# Altium PCB PDM.PcbDoc (part 1 of 4)
Units mm, origin at the board's own origin, x right, y up, seen from the top; angles counter-clockwise.
Board outline 144.75 x 149.75 mm, 4 copper layers (Top Layer, GND, 3V3, Bottom Layer), stack 1.792 mm thick; 174 components, 85 nets, 467 pads, 47 vias.
Unrouted connection lines stored in the file: 147.
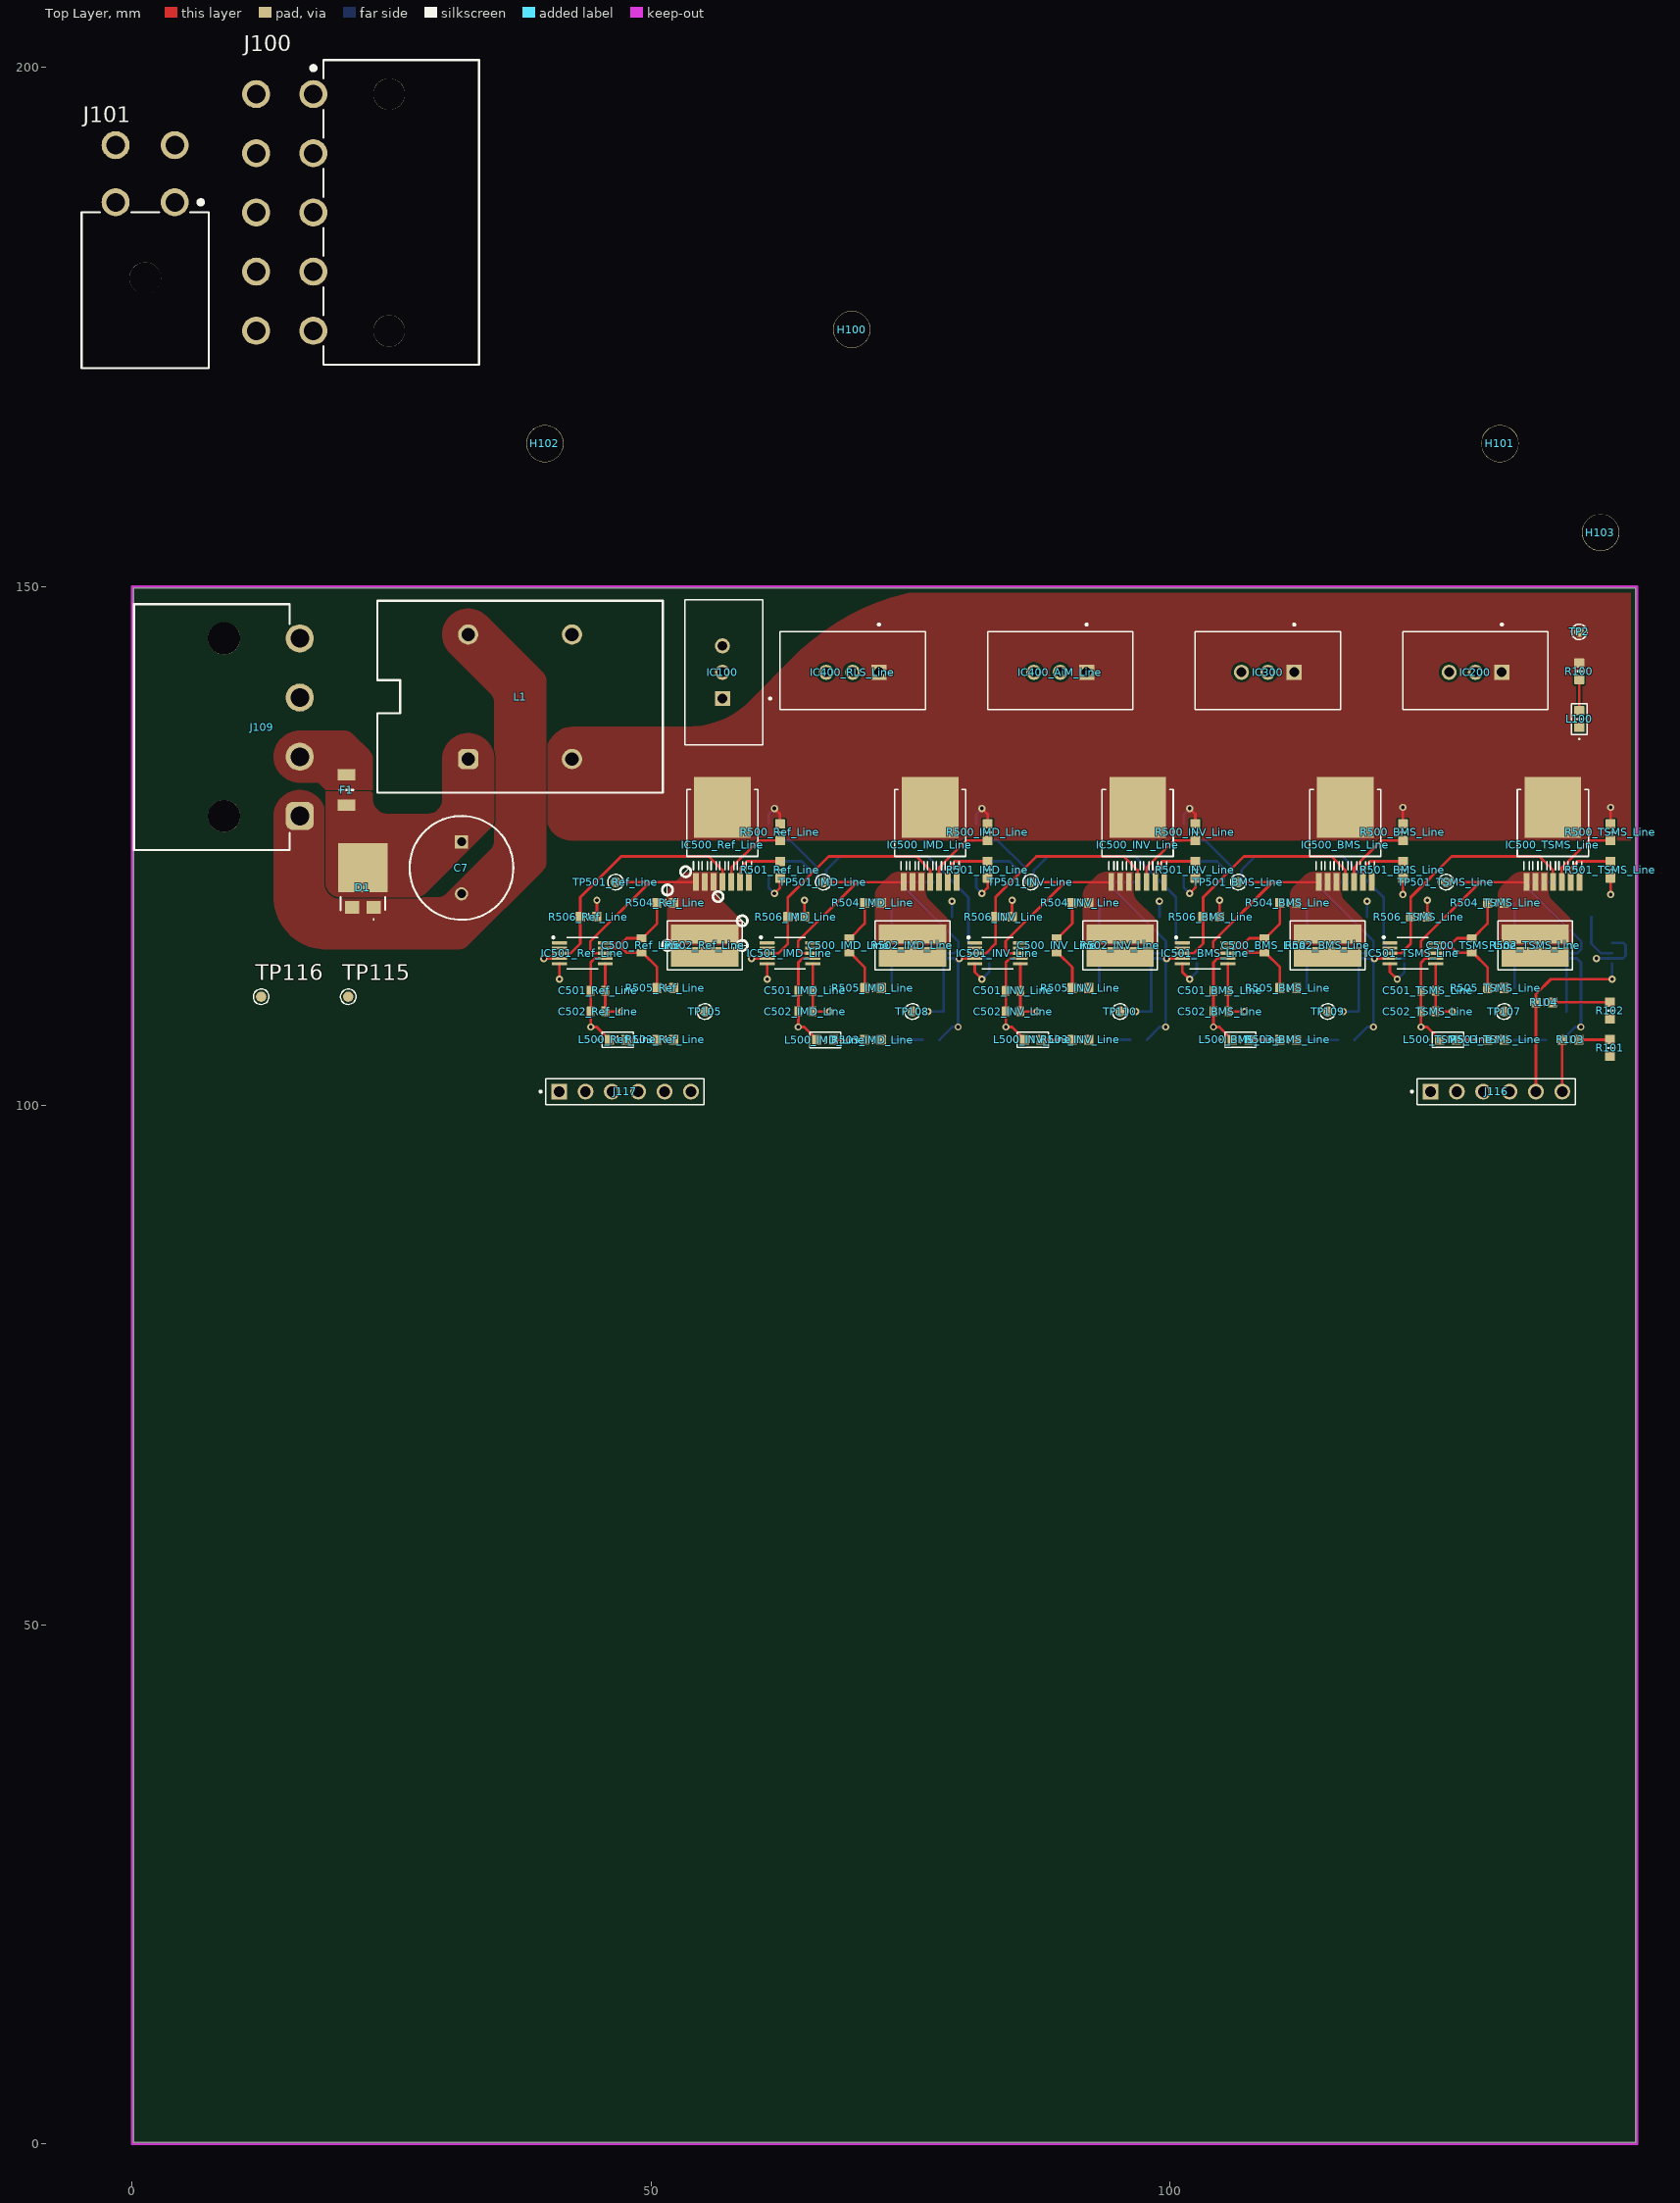
[diagram p0: Top Layer view]
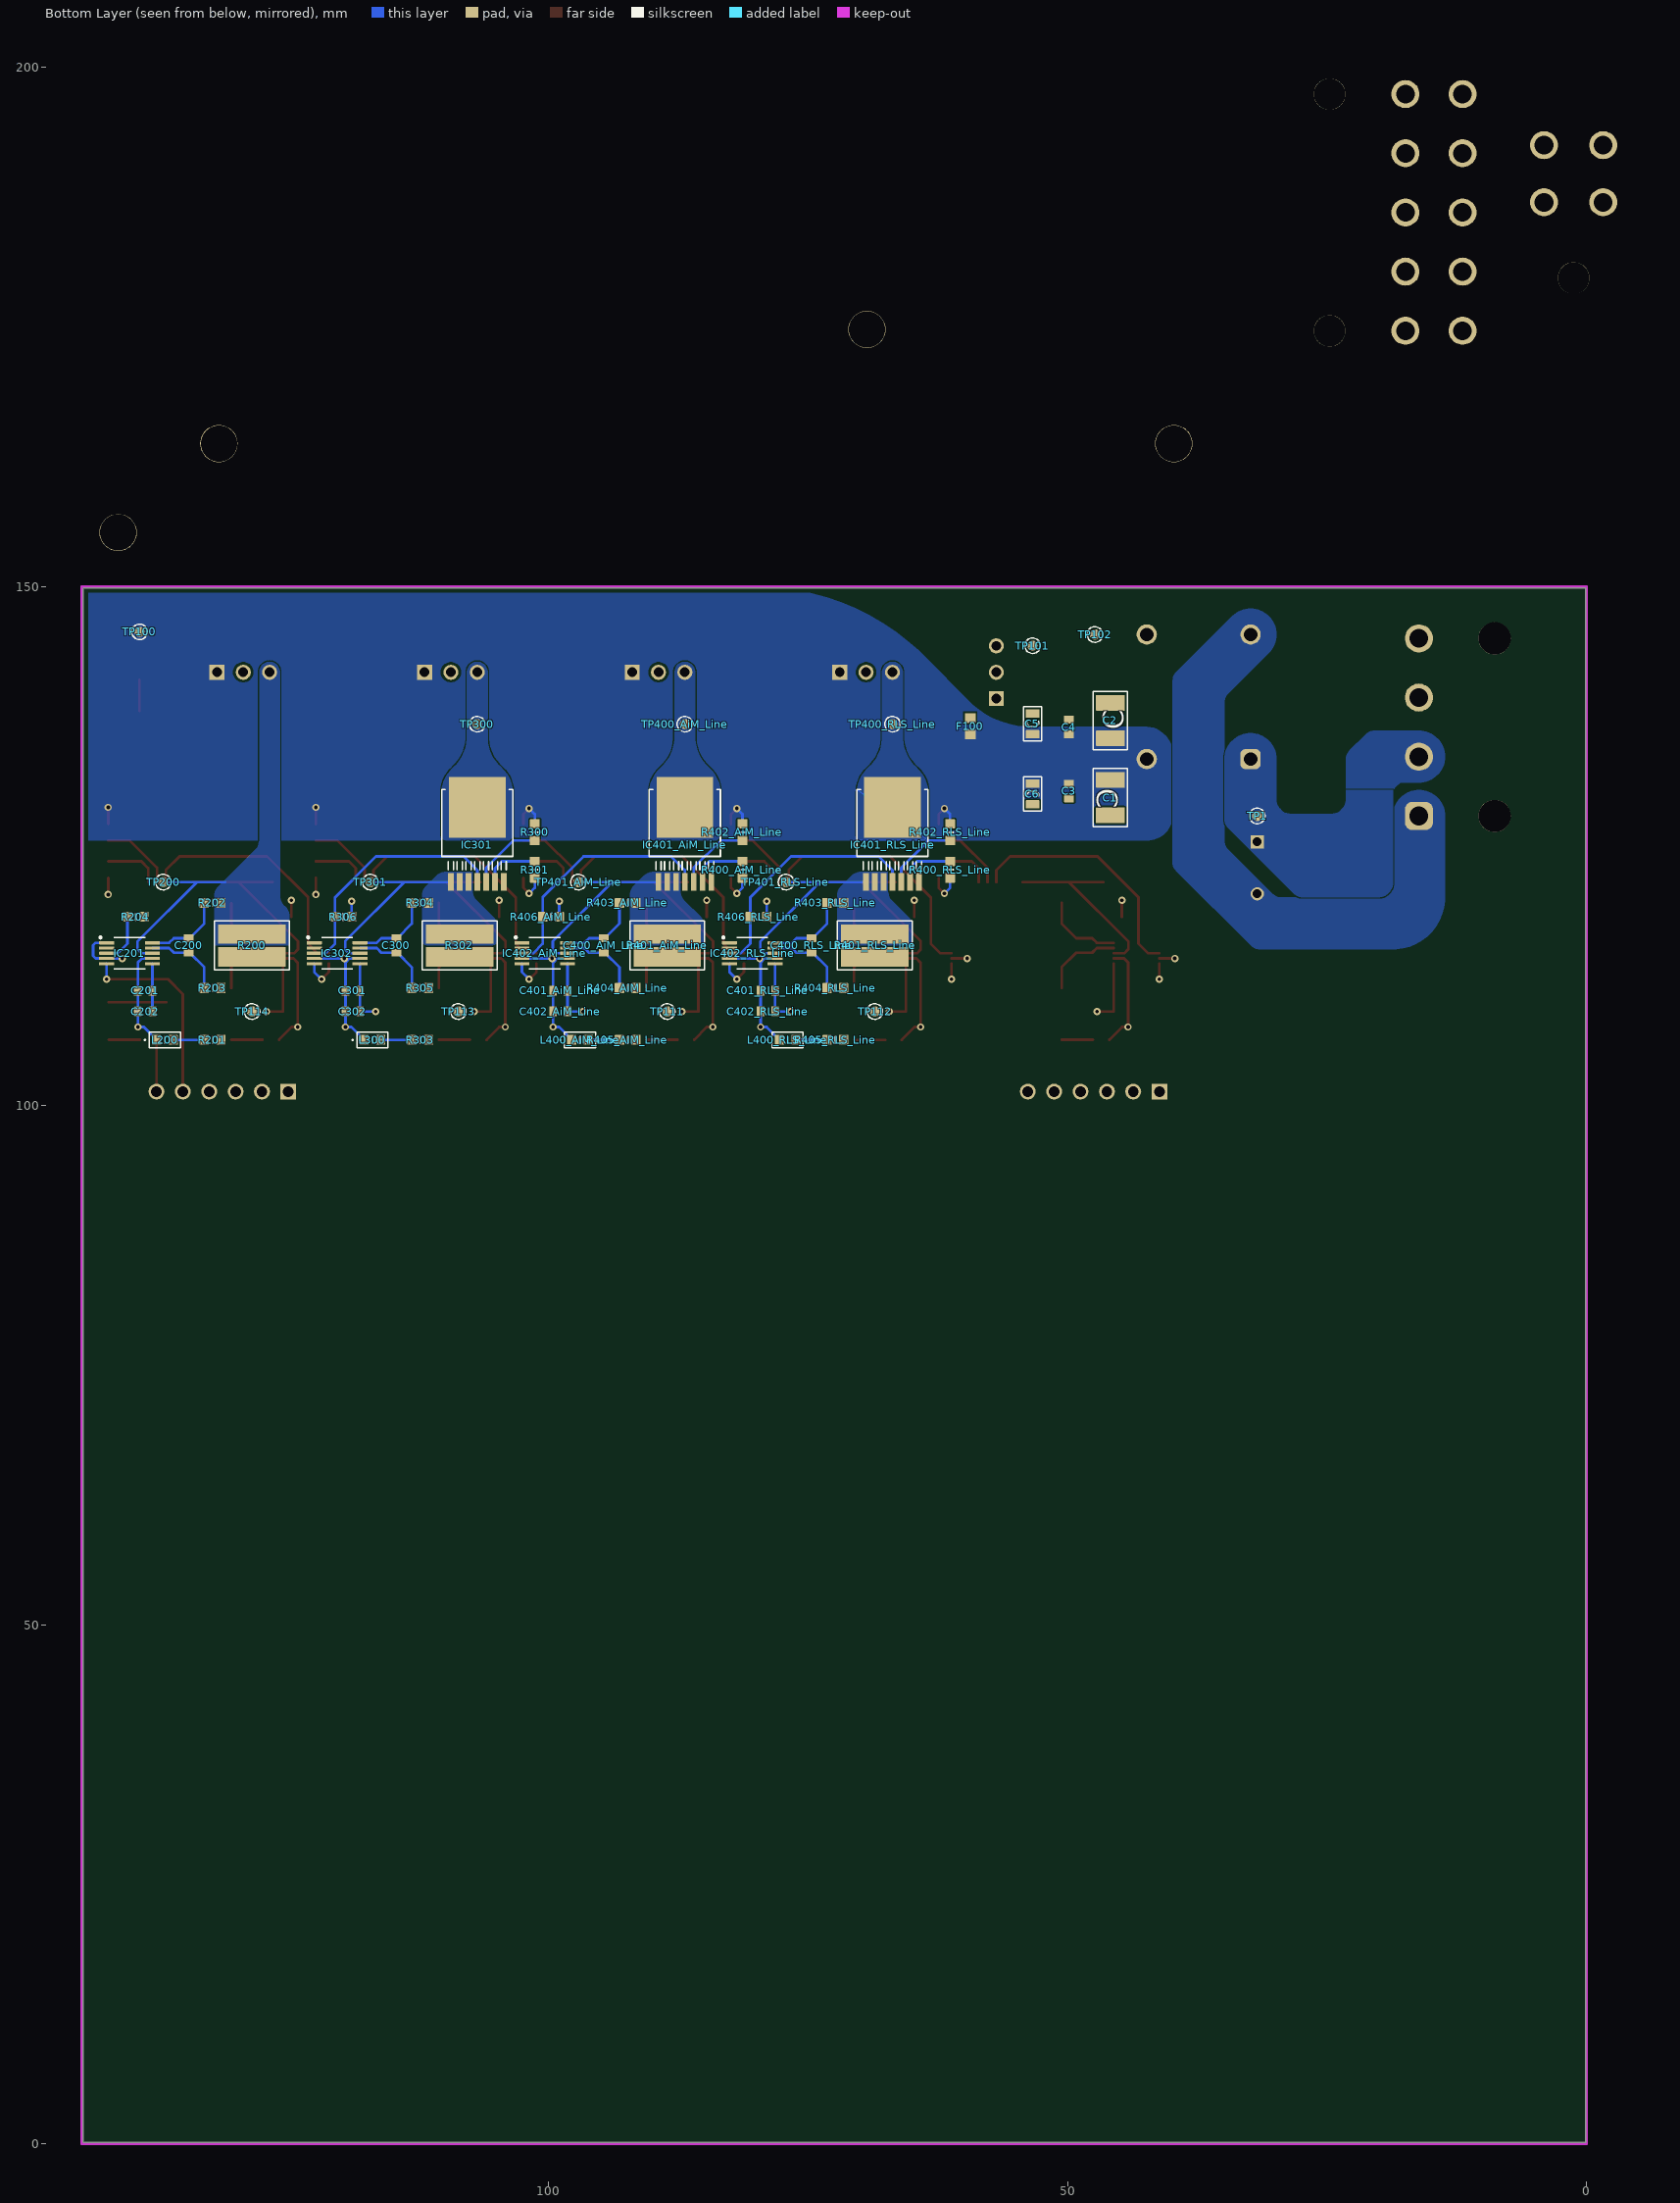
[diagram p1: Bottom Layer view, seen from below]
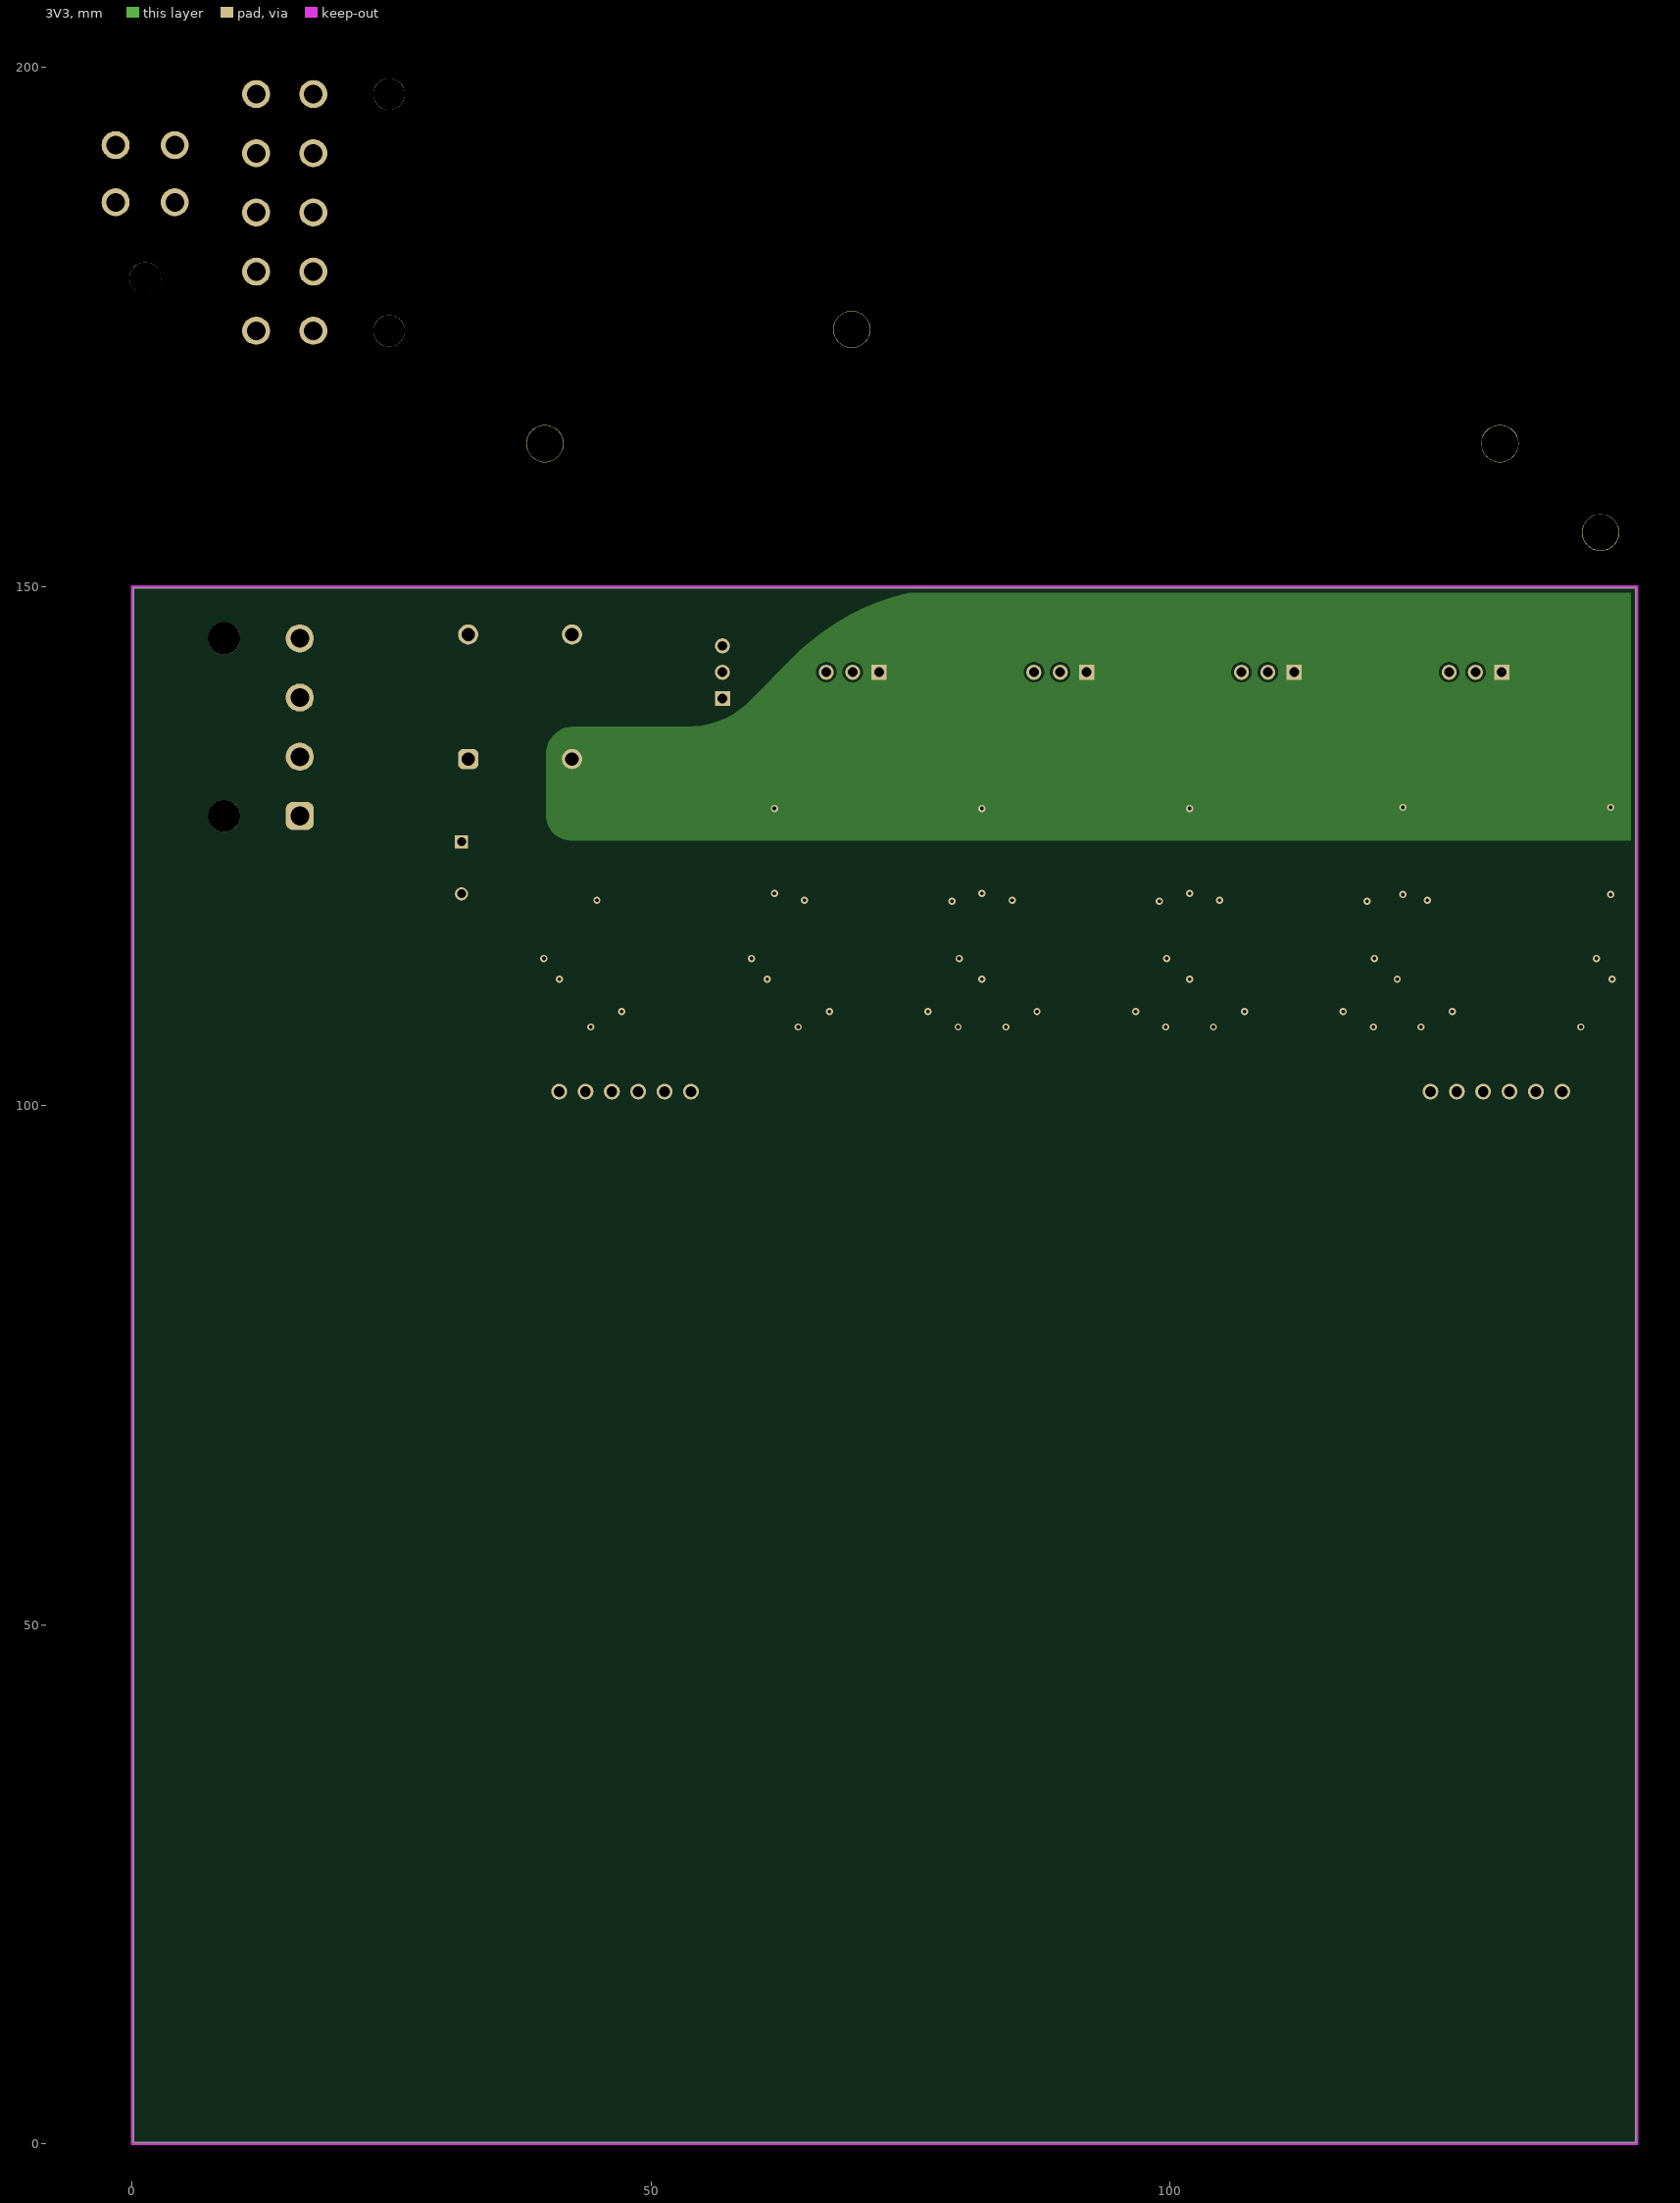
[diagram p2: 3V3]
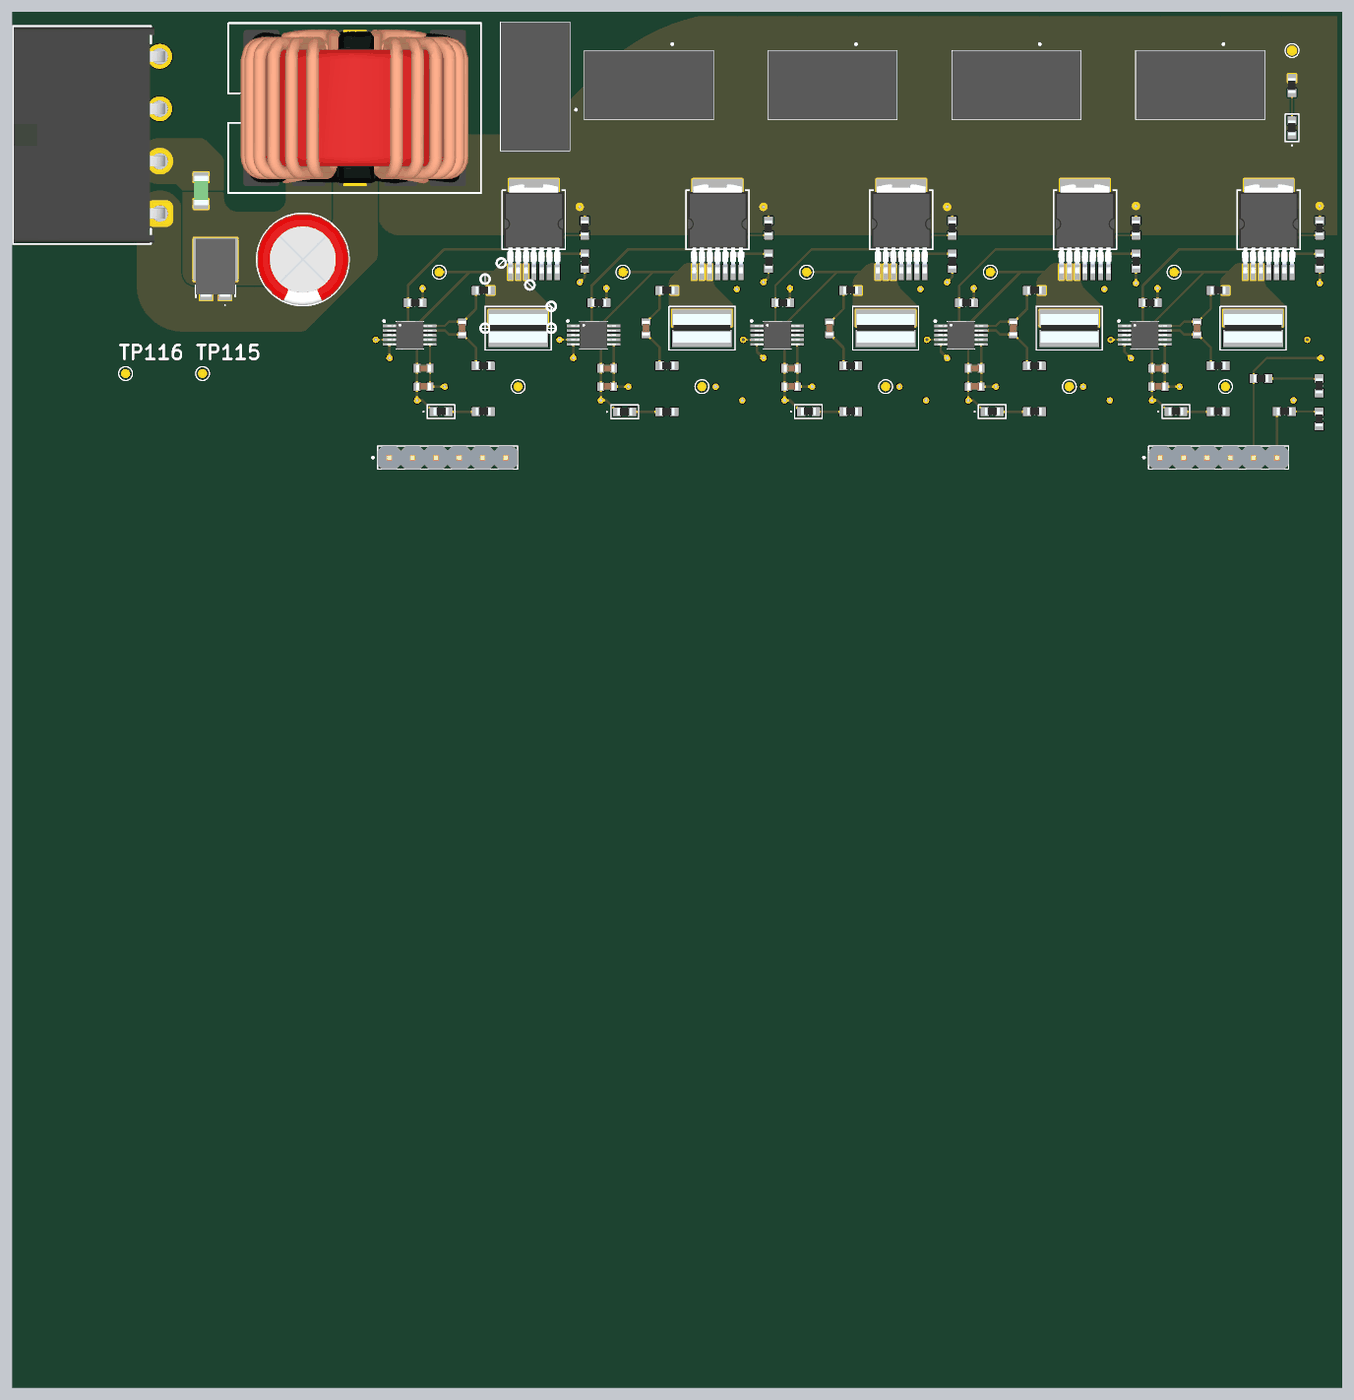
[diagram p5: 3D render of the assembled board from above, using the file's embedded part models]
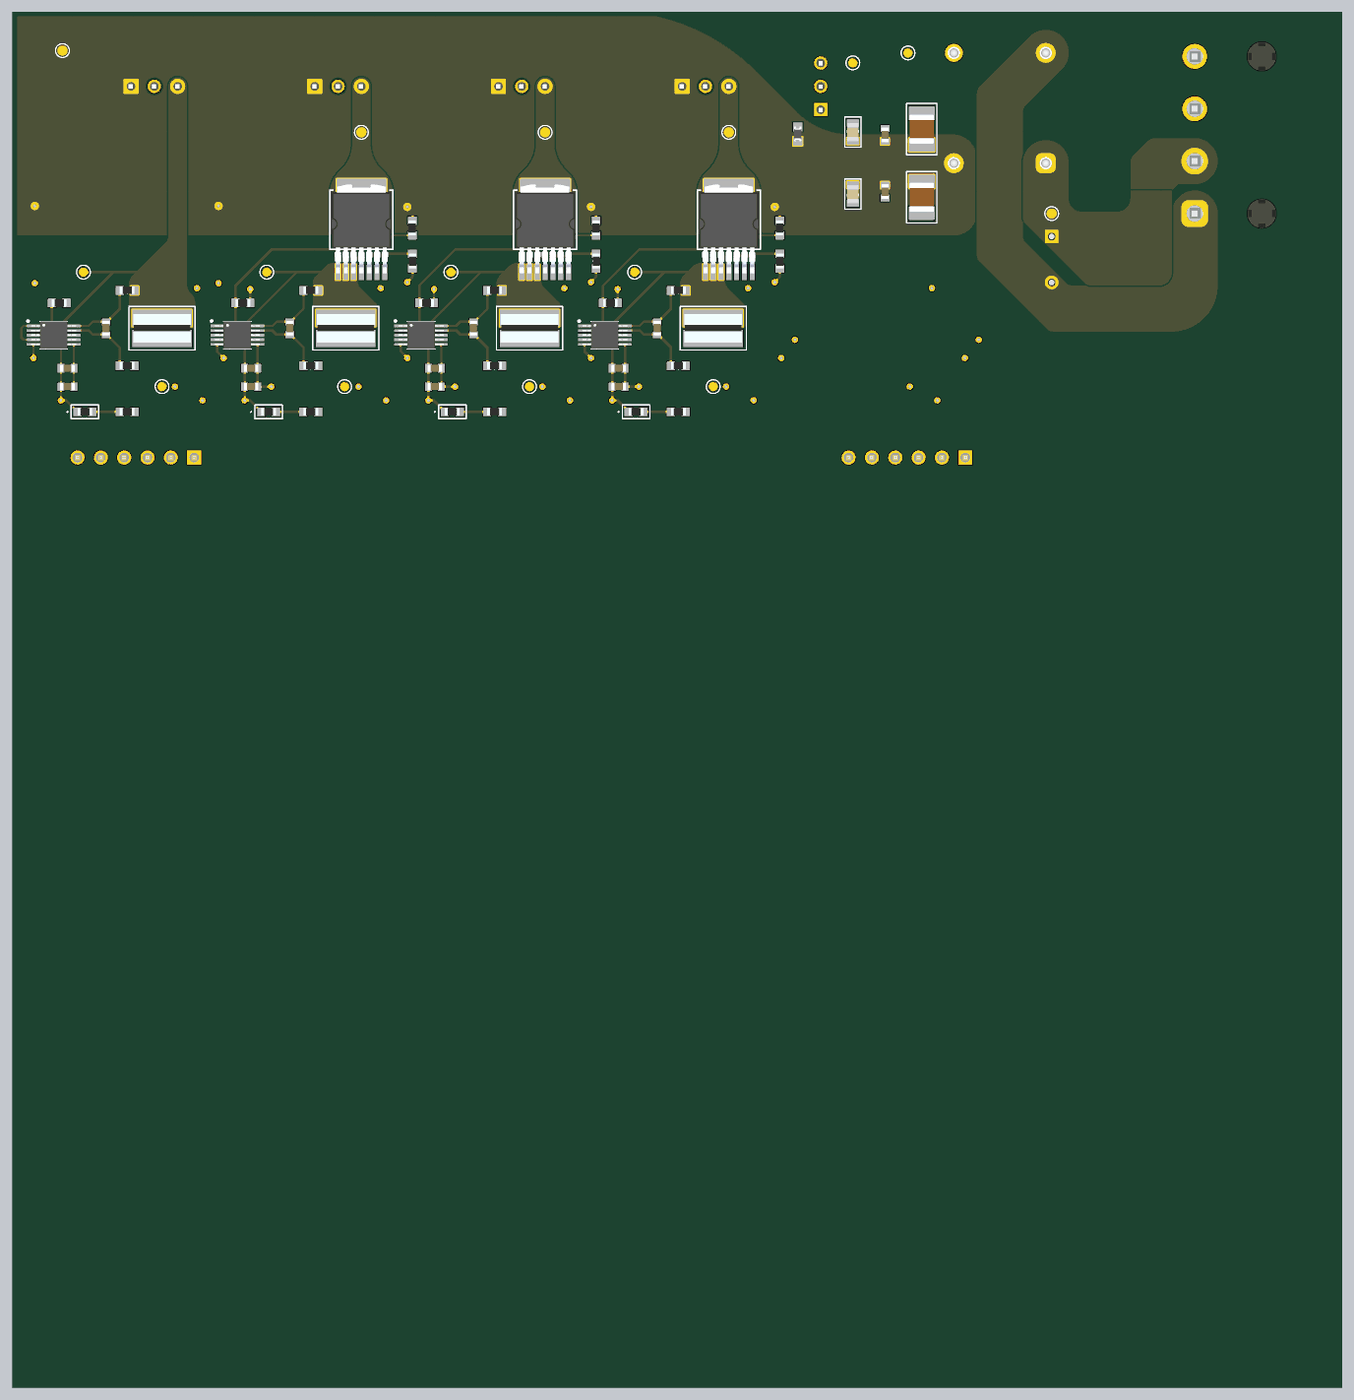
[diagram p6: 3D render of the assembled board from below, using the file's embedded part models]

## Layer stack, top to bottom
Top Solder: solder mask 0.0102, Solder Resist, Dk 3.5
Top Layer: signal copper 0.035
Dielectric 2: prepreg 0.0711, PP-006, Dk 4.1
GND: signal copper 0.035
Dielectric 1: core 1.51, Core-009, Dk 4.5
3V3: signal copper 0.035
Dielectric 3: prepreg 0.0711, PP-006, Dk 4.1
Bottom Layer: signal copper 0.035
Bottom Solder: solder mask 0.0102, Solder Resist, Dk 3.5

## Board outline
0.127,0.127 0.127,149.873 144.873,149.873 144.873,0.127

## Design rules (kind name [scope] priority, off if disabled: settings)
AssemblyTestPointUsage [All] p1 off:
AssemblyTestpoint [All] p1 off: testpointundercomponent=TRUE minsize=1.016 maxsize=2.54 preferedsize=1.524 minholesize=0 maxholesize=1.016 preferedholesize=0.813 testpointgrid=0.025 usegrid=TRUE gridtolerance=0 allowsidetop=TRUE allowsidebottom=TRUE
BoardOutlineClearance [All] p1: gap=0.5 ignorepadtopadclearanceinfootprint=FALSE
Clearance [All] p1: gap=0.15 ignorepadtopadclearanceinfootprint=FALSE except(0.5: Fill-Hole Poly-Hole Region-Hole)
ComponentClearance [All] p1: gap=0.254 collisioncheckmode=3 verticalgap=0.254 showdistances=FALSE donotcheckwithout3dbody=TRUE
DiffPairsRouting CHRG_USB [InDifferentialPair('CHRG_USB')] p1: maxlimit=0.15 minlimit=0.15 mostfreqgap=0.15 toplayer_minwidth=0.129 toplayer_maxwidth=0.129 toplayer_prefwidth=0.129 bottomlayer_minwidth=0.129 bottomlayer_maxwidth=0.129 bottomlayer_prefwidth=0.129 impedanceprofiledriven=TRUE impedanceprofileid={92A8E9D1-0FB6-4D3A-BABC-FC16B8604E78} impedanceprofilevalue=90.000000 maxuncoupledlength=10
DiffPairsRouting USB [InDifferentialPair('USB')] p2: maxlimit=0.15 minlimit=0.15 mostfreqgap=0.15 toplayer_minwidth=0.129 toplayer_maxwidth=0.129 toplayer_prefwidth=0.129 bottomlayer_minwidth=0.129 bottomlayer_maxwidth=0.129 bottomlayer_prefwidth=0.129 impedanceprofiledriven=TRUE impedanceprofileid={92A8E9D1-0FB6-4D3A-BABC-FC16B8604E78} impedanceprofilevalue=90.000000 maxuncoupledlength=10
DiffPairsRouting USB_conn [InDifferentialPair('USB_conn')] p3: maxlimit=0.15 minlimit=0.15 mostfreqgap=0.15 toplayer_minwidth=0.129 toplayer_maxwidth=0.129 toplayer_prefwidth=0.129 bottomlayer_minwidth=0.129 bottomlayer_maxwidth=0.129 bottomlayer_prefwidth=0.129 impedanceprofiledriven=TRUE impedanceprofileid={92A8E9D1-0FB6-4D3A-BABC-FC16B8604E78} impedanceprofilevalue=90.000000 maxuncoupledlength=10
DiffPairsRouting [All] p4: maxlimit=0.254 minlimit=0.254 mostfreqgap=0.254 toplayer_minwidth=0.381 toplayer_maxwidth=0.381 toplayer_prefwidth=0.381 midlayer1_minwidth=0.381 midlayer1_maxwidth=0.381 midlayer1_prefwidth=0.381 midlayer2_minwidth=0.381 midlayer2_maxwidth=0.381 midlayer2_prefwidth=0.381 bottomlayer_minwidth=0.381 bottomlayer_maxwidth=0.381 bottomlayer_prefwidth=0.381 maxuncoupledlength=12.7
FabricationTestPointUsage [All] p1 off: valid=0 allowmultiple=FALSE
FabricationTestpoint [All] p1 off: side=3 testpointundercomponent=TRUE minsize=1.016 maxsize=2.54 preferedsize=1.524 minholesize=0 maxholesize=1.016 preferedholesize=0.813 testpointgrid=0.025 allowsidetop=TRUE allowsidebottom=TRUE usegrid=TRUE gridtolerance=0
HoleSize [All] p1: absolutevalues=TRUE maxlimit=5.6 minlimit=0.5 maxpercent=80.000 minpercent=20.000
HoleToHoleClearance [All] p1: gap=0.3 allowstackedmicrovias=TRUE
MinimumAnnularRing [All] p1: minimumring=0.3
MinimumSolderMaskSliver [All] p1: minsoldermaskwidth=0.1
PlaneClearance [All] p1: clearance=0.254
PlaneConnect [All] p1: pad.planeconnectstyle=Relief pad.reliefexpansion=0.508 pad.reliefentries=4 pad.reliefconductorwidth=0.254 pad.reliefairgap=0.254 via.planeconnectstyle=Direct via.reliefexpansion=0.508 via.reliefentries=4 via.reliefconductorwidth=0.254 via.reliefairgap=0.254
PolygonConnect "BAT PWR THT direct" [InComponent('J916') vs InNet('BATT')] p1: connectstyle=Direct reliefconductorwidth=0.254 reliefentries=4 polygonreliefangle="90 Angle" airgapwidth=0.254
PolygonConnect "BAT GND THT direct" [InComponent('J917') vs InNet('GND')] p2: connectstyle=Direct reliefconductorwidth=0.254 reliefentries=4 polygonreliefangle="90 Angle" airgapwidth=0.254
PolygonConnect "USB GND Direct" [InComponent('USB600') vs InNet('GND')] p3: connectstyle=Direct reliefconductorwidth=0.254 reliefentries=4 polygonreliefangle="90 Angle" airgapwidth=0.254
PolygonConnect "XTAL relief" [InComponent('C400') or InComponent('C402') or  InComponent('C403') or  InComponent('C404') or InComponent('XTAL401') vs InNet('GND')] p4: connectstyle=Relief reliefconductorwidth=0.15 reliefentries=4 polygonreliefangle="90 Angle" airgapwidth=0.15
PolygonConnect [All] p5: connectstyle=Direct reliefconductorwidth=0.254 reliefentries=4 polygonreliefangle="90 Angle" airgapwidth=0.254
RoutingVias [All] p1: holewidth=0.35 width=0.7 viastyle="Through Hole" minholewidth=0.15 minwidth=0.25 maxholewidth=0.711 maxwidth=1.27
SilkToSilkClearance [All] p1 off: silktosilkclearance=0.254
SilkToSolderMaskClearance [IsPad] p1: minsilkscreentomaskgap=0.15 clearancetoexposedcopper=TRUE
SolderMaskExpansion [All] p1: expansion=0.102 istentingtop=FALSE
SupplyNets "Schematic Supply Nets_1" [InNet('3V3')] p1: voltage=0.000
SupplyNets "Schematic Supply Nets" [InNet('GND')] p2: voltage=0.000
SupplyNets "Schematic Supply Nets_7" [InNet('24V')] p3: voltage=0.000
UnRoutedNet [All] p1: checkbadconnections=TRUE
Width USART2 [InNetClass('USART2')] p1: maxlimit=0.156 minlimit=0.156 preferedwidth=0.156 impedanceprofiledriven=TRUE impedanceprofileid={209BCAA6-5E9C-45D0-BAB2-01DA54B45BDC} impedanceprofilevalue=50.000000 minimp=50.000000 maximp=50.000000 favimp=50.000000
Width I2C [InNetClass('I2C1') or InNetClass('I2C2')] p2: maxlimit=0.156 minlimit=0.156 preferedwidth=0.156 impedanceprofiledriven=TRUE impedanceprofileid={209BCAA6-5E9C-45D0-BAB2-01DA54B45BDC} impedanceprofilevalue=50.000000 minimp=50.000000 maximp=50.000000 favimp=50.000000
Width [All] p3: maxlimit=3 minlimit=0.15 preferedwidth=0.254
16 further rules are at their usual default settings.

## Classes and differential pairs
component class TSMS_Line: C500_TSMS_Line C501_TSMS_Line C502_TSMS_Line IC500_TSMS_Line IC501_TSMS_Line L500_TSMS_Line R500_TSMS_Line R501_TSMS_Line R502_TSMS_Line R503_TSMS_Line R504_TSMS_Line R505_TSMS_Line R506_TSMS_Line TP501_TSMS_Line
component class Entrada: C1 C2 C3 C4 C5 C6 C7 D1 F1 L1 TP1 TP2
component class INV_Line: C500_INV_Line C501_INV_Line C502_INV_Line IC500_INV_Line IC501_INV_Line L500_INV_Line R500_INV_Line R501_INV_Line R502_INV_Line R503_INV_Line R504_INV_Line R505_INV_Line R506_INV_Line TP501_INV_Line
channel class Power_Line_24V: BMS_Line IMD_Line INV_Line Ref_Line TSMS_Line
channel class Power_Line_12V: AiM_Line RLS_Line
component class RLS_Line: C400_RLS_Line C401_RLS_Line C402_RLS_Line IC8_RLS_Line IC400_RLS_Line IC401_RLS_Line IC402_RLS_Line L400_RLS_Line R14_RLS_Line R400_RLS_Line R401_RLS_Line R402_RLS_Line R403_RLS_Line R404_RLS_Line R405_RLS_Line R406_RLS_Line TP400_RLS_Line TP401_RLS_Line
component class Ref_Line: C500_Ref_Line C501_Ref_Line C502_Ref_Line IC11_Ref_Line IC500_Ref_Line IC501_Ref_Line L500_Ref_Line R20_Ref_Line R500_Ref_Line R501_Ref_Line R502_Ref_Line R503_Ref_Line R504_Ref_Line R505_Ref_Line R506_Ref_Line TP501_Ref_Line
component class IMD_Line: C500_IMD_Line C501_IMD_Line C502_IMD_Line IC11_IMD_Line IC500_IMD_Line IC501_IMD_Line L500_IMD_Line R20_IMD_Line R500_IMD_Line R501_IMD_Line R502_IMD_Line R503_IMD_Line R504_IMD_Line R505_IMD_Line R506_IMD_Line TP501_IMD_Line
component class ECU_Line: C200 C201 C202 IC2 IC200 IC201 L200 R2 R200 R201 R202 R203 R204 TP200
component class BMS_Line: C500_BMS_Line C501_BMS_Line C502_BMS_Line IC11_BMS_Line IC500_BMS_Line IC501_BMS_Line L500_BMS_Line R20_BMS_Line R500_BMS_Line R501_BMS_Line R502_BMS_Line R503_BMS_Line R504_BMS_Line R505_BMS_Line R506_BMS_Line TP501_BMS_Line
component class AiM_Line: C400_AiM_Line C401_AiM_Line C402_AiM_Line IC8_AiM_Line IC400_AiM_Line IC401_AiM_Line IC402_AiM_Line L400_AiM_Line R14_AiM_Line R400_AiM_Line R401_AiM_Line R402_AiM_Line R403_AiM_Line R404_AiM_Line R405_AiM_Line R406_AiM_Line TP400_AiM_Line TP401_AiM_Line
component class 5V_Line: C300 C301 C302 IC5 IC300 IC301 IC302 L300 R8 R300 R301 R302 R303 R304 R305 R306 TP300 TP301
component class Master: F100 H100 H101 H102 H103 IC100 J100 J101 J108 J109 J116 J117 L100 R100 R101 R102 R103 R104 TP100 TP101 TP102 TP105 TP107 TP108 TP109 TP110 TP111 TP112 TP113 TP114 TP115 TP116

## Components (designator, comment, footprint, x,y, rotation, side; value= is the part's Value field where it differs from the comment)
C1 "CAP non polarized" "CAP SMD 1210" 45.885,129.668 r270 bottom value="50V 10uF X7R"
C2 "CAP non polarized" "CAP SMD 1210" 45.885,137.088 r90 bottom value="50V 10uF X7R"
C3 "CAP non polarized" "CAP SMD 0603" 49.885,130.293 r270 bottom value="50V 1uF X7R"
C4 "CAP non polarized" "CAP SMD 0603" 49.885,136.463 r90 bottom value="50V 1uF X7R"
C5 "CAP non polarized" "CAP SMD 0805" 53.385,136.763 r90 bottom value="50V 0.1uF X7R"
C6 "CAP non polarized" "CAP SMD 0805" 53.385,130.018 r270 bottom value="50V 0.1uF X7R"
C7 "CAP polarized" CAP_10Dx20L 31.74,125.4 r270 top value="470uF 50V 20%"
C200 "CAP non polarized" "CAP SMD 0603" 134.685,115.426 r270 bottom value="16V 0.1uF X7R"
C201 "CAP non polarized" "CAP SMD 0603" 138.885,111.071 r180 bottom value="16V 0.1uF X7R"
C202 "CAP non polarized" "CAP SMD 0603" 138.885,109.071 r180 bottom value="16V 1uF X7R"
C300 "CAP non polarized" "CAP SMD 0603" 114.685,115.426 r270 bottom value="16V 0.1uF X7R"
C301 "CAP non polarized" "CAP SMD 0603" 118.885,111.071 r180 bottom value="16V 0.1uF X7R"
C302 "CAP non polarized" "CAP SMD 0603" 118.885,109.071 r180 bottom value="16V 1uF X7R"
C400_AiM_Line "CAP non polarized" "CAP SMD 0603" 94.685,115.426 r270 bottom value="16V 0.1uF X7R" (schematic designator C400)
C400_RLS_Line "CAP non polarized" "CAP SMD 0603" 74.685,115.426 r270 bottom value="16V 0.1uF X7R" (schematic designator C400)
C401_AiM_Line "CAP non polarized" "CAP SMD 0603" 98.885,111.071 r180 bottom value="16V 0.1uF X7R" (schematic designator C401)
C401_RLS_Line "CAP non polarized" "CAP SMD 0603" 78.885,111.071 r180 bottom value="16V 0.1uF X7R" (schematic designator C401)
C402_AiM_Line "CAP non polarized" "CAP SMD 0603" 98.885,109.071 r180 bottom value="16V 1uF X7R" (schematic designator C402)
C402_RLS_Line "CAP non polarized" "CAP SMD 0603" 78.885,109.071 r180 bottom value="16V 1uF X7R" (schematic designator C402)
C500_BMS_Line "CAP non polarized" "CAP SMD 0603" 109.085,115.426 r270 top value="16V 0.1uF X7R" (schematic designator C500)
C500_IMD_Line "CAP non polarized" "CAP SMD 0603" 69.085,115.426 r270 top value="16V 0.1uF X7R" (schematic designator C500)
C500_INV_Line "CAP non polarized" "CAP SMD 0603" 89.085,115.426 r270 top value="16V 0.1uF X7R" (schematic designator C500)
C500_Ref_Line "CAP non polarized" "CAP SMD 0603" 49.085,115.426 r270 top value="16V 0.1uF X7R" (schematic designator C500)
C500_TSMS_Line "CAP non polarized" "CAP SMD 0603" 129.085,115.426 r270 top value="16V 0.1uF X7R" (schematic designator C500)
C501_BMS_Line "CAP non polarized" "CAP SMD 0603" 104.885,111.071 r0 top value="16V 0.1uF X7R" (schematic designator C501)
C501_IMD_Line "CAP non polarized" "CAP SMD 0603" 64.885,111.071 r0 top value="16V 0.1uF X7R" (schematic designator C501)
C501_INV_Line "CAP non polarized" "CAP SMD 0603" 84.885,111.071 r0 top value="16V 0.1uF X7R" (schematic designator C501)
C501_Ref_Line "CAP non polarized" "CAP SMD 0603" 44.885,111.071 r0 top value="16V 0.1uF X7R" (schematic designator C501)
C501_TSMS_Line "CAP non polarized" "CAP SMD 0603" 124.885,111.071 r0 top value="16V 0.1uF X7R" (schematic designator C501)
C502_BMS_Line "CAP non polarized" "CAP SMD 0603" 104.885,109.071 r0 top value="16V 1uF X7R" (schematic designator C502)
C502_IMD_Line "CAP non polarized" "CAP SMD 0603" 64.885,109.071 r0 top value="16V 1uF X7R" (schematic designator C502)
C502_INV_Line "CAP non polarized" "CAP SMD 0603" 84.885,109.071 r0 top value="16V 1uF X7R" (schematic designator C502)
C502_Ref_Line "CAP non polarized" "CAP SMD 0603" 44.885,109.071 r0 top value="16V 1uF X7R" (schematic designator C502)
C502_TSMS_Line "CAP non polarized" "CAP SMD 0603" 124.885,109.071 r0 top value="16V 1uF X7R" (schematic designator C502)
D1 "DIODE SCHOTTKY 3P" TO-277A-3 22.24,121.86 r0 top value="100V 20A"
F1 "FUSE" "FUSE SMD 1206" 20.67,130.4 r270 top value=12A
F100 "FUSE" "FUSE SMD 0603" 59.385,136.548 r90 bottom value=3.15A
H100 "SCREW M3" M3 69.342,174.752 r0 top value=-
H101 "SCREW M3" M3 131.777,163.766 r0 top value=-
H102 "SCREW M3" M3 39.777,163.766 r0 top value=-
H103 "SCREW M3" M3 141.478,155.194 r0 top value=-
IC100 "TEN 2" "TEN 2" 56.885,141.74 r90 top value=24V-3V3
IC200 "TEN 2" "TEN 2" 129.425,141.74 r180 top value=24V-3V3
IC201 "INA226" VSOP-10 140.385,114.676 r180 bottom value=-
IC300 "TEN 2" "TEN 2" 109.425,141.74 r180 top value=24V-5V
IC301 "VN7007AHTR" Octapak-7 106.885,127.229 r180 bottom value=-
IC302 "INA226" VSOP-10 120.385,114.676 r180 bottom value=-
IC400_AiM_Line "TEN 2" "TEN 2" 89.425,141.74 r180 top value=24V-12V (schematic designator IC400)
IC400_RLS_Line "TEN 2" "TEN 2" 69.425,141.74 r180 top value=24V-12V (schematic designator IC400)
IC401_AiM_Line "VN7007AHTR" Octapak-7 86.885,127.229 r180 bottom value=- (schematic designator IC401)
IC401_RLS_Line "VN7007AHTR" Octapak-7 66.885,127.229 r180 bottom value=- (schematic designator IC401)
IC402_AiM_Line "INA226" VSOP-10 100.385,114.676 r180 bottom value=- (schematic designator IC402)
IC402_RLS_Line "INA226" VSOP-10 80.385,114.676 r180 bottom value=- (schematic designator IC402)
IC500_BMS_Line "VN7007AHTR" Octapak-7 116.885,127.229 r0 top value=- (schematic designator IC500)
IC500_IMD_Line "VN7007AHTR" Octapak-7 76.885,127.229 r0 top value=- (schematic designator IC500)
IC500_INV_Line "VN7007AHTR" Octapak-7 96.885,127.229 r0 top value=- (schematic designator IC500)
IC500_Ref_Line "VN7007AHTR" Octapak-7 56.885,127.229 r0 top value=- (schematic designator IC500)
IC500_TSMS_Line "VN7007AHTR" Octapak-7 136.885,127.229 r0 top value=- (schematic designator IC500)
IC501_BMS_Line "INA226" VSOP-10 103.385,114.676 r0 top value=- (schematic designator IC501)
IC501_IMD_Line "INA226" VSOP-10 63.385,114.676 r0 top value=- (schematic designator IC501)
IC501_INV_Line "INA226" VSOP-10 83.385,114.676 r0 top value=- (schematic designator IC501)
IC501_Ref_Line "INA226" VSOP-10 43.385,114.676 r0 top value=- (schematic designator IC501)
IC501_TSMS_Line "INA226" VSOP-10 123.385,114.676 r0 top value=- (schematic designator IC501)
J100 "CONN 10P" 657010240101 17.465,197.425 r90 top value=10P
J101 "CONN 4P" 657004240101 1.27,187.005 r0 top value=4P
J108 "AEREO" 657004150201 -20.32,179.451 r180 top value=4P
J109 "CONN 6P" 657004140101 7.7,136.45 r270 top value=4P
J116 "CONN 6P" HEADERS_MALE_6P_2.54MM 131.437,101.354 r0 top value=6P
J117 "CONN 6P" HEADERS_MALE_6P_2.54MM 47.498,101.354 r0 top value=6P
L1 "IND CMM" IND_CMM_THT_10x18.5mm 37.385,139.378 r0 top value="0.5mH 35A 2.3mOhm"
L100 "LED WHITE" "LED SMD 0603" 139.425,137.23 r90 top value=Green
L200 "LED WHITE" "LED SMD 0603" 136.985,106.326 r180 bottom value=Green
L300 "LED WHITE" "LED SMD 0603" 116.985,106.326 r180 bottom value=Green
L400_AiM_Line "LED WHITE" "LED SMD 0603" 96.985,106.326 r180 bottom value=Green (schematic designator L400)
L400_RLS_Line "LED WHITE" "LED SMD 0603" 76.985,106.326 r180 bottom value=Green (schematic designator L400)
L500_BMS_Line "LED WHITE" "LED SMD 0603" 106.785,106.35 r0 top value=Green (schematic designator L500)
L500_IMD_Line "LED WHITE" "LED SMD 0603" 66.785,106.326 r0 top value=Green (schematic designator L500)
L500_INV_Line "LED WHITE" "LED SMD 0603" 86.785,106.35 r0 top value=Green (schematic designator L500)
L500_Ref_Line "LED WHITE" "LED SMD 0603" 46.785,106.35 r0 top value=Green (schematic designator L500)
L500_TSMS_Line "LED WHITE" "LED SMD 0603" 126.785,106.35 r0 top value=Green (schematic designator L500)
R100 "RES" "RES SMD 0603" 139.425,141.83 r90 top value="1.8kΩ 100mW ±1%"
R101 "RES" "RES SMD 0603" 142.387,105.554 r90 top value="10kΩ 100mW ±1%"
R102 "RES" "RES SMD 0603" 142.387,109.154 r90 top value="10kΩ 100mW ±1%"
R103 "RES" "RES SMD 0603" 138.587,106.354 r0 top value="0Ω 100mW ±5%"
R104 "RES" "RES SMD 0603" 136.047,109.954 r0 top value="0Ω 100mW ±5%"
R200 "RES" "RES SMD 1225 Reversed" 128.585,115.426 r90 bottom value="7mΩ 3W ±1%"
R201 "RES" "RES SMD 0603" 132.385,106.326 r180 bottom value="100Ω 100mW ±1%"
R202 "RES" "RES SMD 0603" 132.385,119.526 r180 bottom value="10Ω 100mW ±1%"
R203 "RES" "RES SMD 0603" 132.385,111.326 r180 bottom value="10Ω 100mW ±1%"
R204 "RES" "RES SMD 0603" 139.785,118.176 r0 bottom value="10kΩ 100mW ±1%"
R300 "RES" "RES SMD 0603" 101.335,126.326 r90 bottom value="10kΩ 100mW ±1%"
R301 "RES" "RES SMD 0603" 101.335,122.726 r270 bottom value="10kΩ 100mW ±1%"
R302 "RES" "RES SMD 1225 Reversed" 108.585,115.426 r90 bottom value="7mΩ 3W ±1%"
R303 "RES" "RES SMD 0603" 112.385,106.326 r180 bottom value="220Ω 100mW ±1%"
R304 "RES" "RES SMD 0603" 112.385,119.526 r180 bottom value="10Ω 100mW ±1%"
R305 "RES" "RES SMD 0603" 112.385,111.326 r180 bottom value="10Ω 100mW ±1%"
R306 "RES" "RES SMD 0603" 119.785,118.176 r0 bottom value="10kΩ 100mW ±1%"
R400_AiM_Line "RES" "RES SMD 0603" 81.335,122.726 r270 bottom value="10kΩ 100mW ±1%" (schematic designator R400)
R400_RLS_Line "RES" "RES SMD 0603" 61.335,122.726 r270 bottom value="10kΩ 100mW ±1%" (schematic designator R400)
R401_AiM_Line "RES" "RES SMD 1225 Reversed" 88.585,115.426 r90 bottom value="7mΩ 3W ±1%" (schematic designator R401)
R401_RLS_Line "RES" "RES SMD 1225 Reversed" 68.585,115.426 r90 bottom value="7mΩ 3W ±1%" (schematic designator R401)
R402_AiM_Line "RES" "RES SMD 0603" 81.335,126.326 r90 bottom value="10kΩ 100mW ±1%" (schematic designator R402)
R402_RLS_Line "RES" "RES SMD 0603" 61.335,126.326 r90 bottom value="10kΩ 100mW ±1%" (schematic designator R402)
R403_AiM_Line "RES" "RES SMD 0603" 92.385,119.526 r180 bottom value="10Ω 100mW ±1%" (schematic designator R403)
R403_RLS_Line "RES" "RES SMD 0603" 72.385,119.526 r180 bottom value="10Ω 100mW ±1%" (schematic designator R403)
R404_AiM_Line "RES" "RES SMD 0603" 92.385,111.326 r180 bottom value="10Ω 100mW ±1%" (schematic designator R404)
R404_RLS_Line "RES" "RES SMD 0603" 72.385,111.326 r180 bottom value="10Ω 100mW ±1%" (schematic designator R404)
R405_AiM_Line "RES" "RES SMD 0603" 92.385,106.326 r180 bottom value="1.8kΩ 100mW ±1%" (schematic designator R405)
R405_RLS_Line "RES" "RES SMD 0603" 72.385,106.326 r180 bottom value="1.8kΩ 100mW ±1%" (schematic designator R405)
R406_AiM_Line "RES" "RES SMD 0603" 99.785,118.176 r0 bottom value="10kΩ 100mW ±1%" (schematic designator R406)
R406_RLS_Line "RES" "RES SMD 0603" 79.785,118.176 r0 bottom value="10kΩ 100mW ±1%" (schematic designator R406)
R500_BMS_Line "RES" "RES SMD 0603" 122.435,126.326 r90 top value="10kΩ 100mW ±1%" (schematic designator R500)
R500_IMD_Line "RES" "RES SMD 0603" 82.435,126.326 r90 top value="10kΩ 100mW ±1%" (schematic designator R500)
R500_INV_Line "RES" "RES SMD 0603" 102.435,126.326 r90 top value="10kΩ 100mW ±1%" (schematic designator R500)
R500_Ref_Line "RES" "RES SMD 0603" 62.435,126.326 r90 top value="10kΩ 100mW ±1%" (schematic designator R500)
R500_TSMS_Line "RES" "RES SMD 0603" 142.435,126.326 r90 top value="10kΩ 100mW ±1%" (schematic designator R500)
R501_BMS_Line "RES" "RES SMD 0603" 122.435,122.726 r270 top value="10kΩ 100mW ±1%" (schematic designator R501)
R501_IMD_Line "RES" "RES SMD 0603" 82.435,122.726 r270 top value="10kΩ 100mW ±1%" (schematic designator R501)
R501_INV_Line "RES" "RES SMD 0603" 102.435,122.726 r270 top value="10kΩ 100mW ±1%" (schematic designator R501)
R501_Ref_Line "RES" "RES SMD 0603" 62.435,122.726 r270 top value="10kΩ 100mW ±1%" (schematic designator R501)
R501_TSMS_Line "RES" "RES SMD 0603" 142.435,122.726 r270 top value="10kΩ 100mW ±1%" (schematic designator R501)
R502_BMS_Line "RES" "RES SMD 1225 Reversed" 115.185,115.426 r90 top value="7mΩ 3W ±1%" (schematic designator R502)
R502_IMD_Line "RES" "RES SMD 1225 Reversed" 75.185,115.426 r90 top value="7mΩ 3W ±1%" (schematic designator R502)
R502_INV_Line "RES" "RES SMD 1225 Reversed" 95.185,115.426 r90 top value="7mΩ 3W ±1%" (schematic designator R502)
R502_Ref_Line "RES" "RES SMD 1225 Reversed" 55.185,115.426 r90 top value="7mΩ 3W ±1%" (schematic designator R502)
R502_TSMS_Line "RES" "RES SMD 1225 Reversed" 135.185,115.426 r90 top value="7mΩ 3W ±1%" (schematic designator R502)
R503_BMS_Line "RES" "RES SMD 0603" 111.385,106.35 r0 top value="1.8kΩ 100mW ±1%" (schematic designator R503)
R503_IMD_Line "RES" "RES SMD 0603" 71.385,106.326 r0 top value="1.8kΩ 100mW ±1%" (schematic designator R503)
R503_INV_Line "RES" "RES SMD 0603" 91.385,106.35 r0 top value="1.8kΩ 100mW ±1%" (schematic designator R503)
R503_Ref_Line "RES" "RES SMD 0603" 51.385,106.35 r0 top value="1.8kΩ 100mW ±1%" (schematic designator R503)
R503_TSMS_Line "RES" "RES SMD 0603" 131.385,106.35 r0 top value="1.8kΩ 100mW ±1%" (schematic designator R503)
R504_BMS_Line "RES" "RES SMD 0603" 111.385,119.526 r0 top value="10Ω 100mW ±1%" (schematic designator R504)
R504_IMD_Line "RES" "RES SMD 0603" 71.385,119.526 r0 top value="10Ω 100mW ±1%" (schematic designator R504)
R504_INV_Line "RES" "RES SMD 0603" 91.385,119.526 r0 top value="10Ω 100mW ±1%" (schematic designator R504)
R504_Ref_Line "RES" "RES SMD 0603" 51.385,119.526 r0 top value="10Ω 100mW ±1%" (schematic designator R504)
R504_TSMS_Line "RES" "RES SMD 0603" 131.385,119.526 r0 top value="10Ω 100mW ±1%" (schematic designator R504)
R505_BMS_Line "RES" "RES SMD 0603" 111.385,111.326 r0 top value="10Ω 100mW ±1%" (schematic designator R505)
R505_IMD_Line "RES" "RES SMD 0603" 71.385,111.326 r0 top value="10Ω 100mW ±1%" (schematic designator R505)
R505_INV_Line "RES" "RES SMD 0603" 91.385,111.326 r0 top value="10Ω 100mW ±1%" (schematic designator R505)
R505_Ref_Line "RES" "RES SMD 0603" 51.385,111.326 r0 top value="10Ω 100mW ±1%" (schematic designator R505)
R505_TSMS_Line "RES" "RES SMD 0603" 131.385,111.326 r0 top value="10Ω 100mW ±1%" (schematic designator R505)
R506_BMS_Line "RES" "RES SMD 0603" 103.985,118.176 r0 top value="10kΩ 100mW ±1%" (schematic designator R506)
R506_IMD_Line "RES" "RES SMD 0603" 63.985,118.176 r0 top value="10kΩ 100mW ±1%" (schematic designator R506)
R506_INV_Line "RES" "RES SMD 0603" 83.985,118.176 r0 top value="10kΩ 100mW ±1%" (schematic designator R506)
R506_Ref_Line "RES" "RES SMD 0603" 43.985,118.176 r0 top value="10kΩ 100mW ±1%" (schematic designator R506)
R506_TSMS_Line "RES" "RES SMD 0603" 123.985,118.176 r0 top value="10kΩ 100mW ±1%" (schematic designator R506)
TP1 "Test Point" TP_SMD_1MM 31.74,127.9 r180 bottom value=-
TP2 "Test Point" TP_SMD_1MM 139.425,145.63 r90 top value=-
TP100 "Test Point" TP_SMD_1MM 139.425,145.63 r90 bottom value=-
TP101 "Test Point" TP_SMD_1MM 53.385,144.296 r90 bottom value=-
TP102 "Test Point" TP_SMD_1MM 47.385,145.378 r90 bottom value=-
TP105 "Test Point" TP_SMD_1MM 55.185,109.072 r90 top value=-
TP107 "Test Point" TP_SMD_1MM 132.185,109.072 r90 top value=-
TP108 "Test Point" TP_SMD_1MM 75.185,109.072 r90 top value=-
TP109 "Test Point" TP_SMD_1MM 115.185,109.072 r90 top value=-
TP110 "Test Point" TP_SMD_1MM 95.185,109.072 r90 top value=-
TP111 "Test Point" TP_SMD_1MM 88.585,109.072 r90 bottom value=-
TP112 "Test Point" TP_SMD_1MM 68.585,109.072 r90 bottom value=-
TP113 "Test Point" TP_SMD_1MM 108.712,109.072 r90 bottom value=-
TP114 "Test Point" TP_SMD_1MM 128.585,109.072 r90 bottom value=-
TP115 "Test Point" TP_SMD_1MM 20.828,110.49 r90 top value=-
TP116 "Test Point" TP_SMD_1MM 12.446,110.49 r90 top value=-
TP200 "Test Point" TP_SMD_1MM 137.139,121.526 r270 bottom value=-
TP300 "Test Point" TP_SMD_1MM 106.885,136.74 r0 bottom value=-
TP301 "Test Point" TP_SMD_1MM 117.185,121.526 r180 bottom value=-
TP400_AiM_Line "Test Point" TP_SMD_1MM 86.885,136.74 r90 bottom value=- (schematic designator TP400)
TP400_RLS_Line "Test Point" TP_SMD_1MM 66.885,136.74 r90 bottom value=- (schematic designator TP400)
TP401_AiM_Line "Test Point" TP_SMD_1MM 97.138,121.526 r90 bottom value=- (schematic designator TP401)
TP401_RLS_Line "Test Point" TP_SMD_1MM 77.139,121.526 r90 bottom value=- (schematic designator TP401)
TP501_BMS_Line "Test Point" TP_SMD_1MM 106.585,121.526 r90 top value=- (schematic designator TP501)
TP501_IMD_Line "Test Point" TP_SMD_1MM 66.585,121.526 r90 top value=- (schematic designator TP501)
TP501_INV_Line "Test Point" TP_SMD_1MM 86.585,121.526 r90 top value=- (schematic designator TP501)
TP501_Ref_Line "Test Point" TP_SMD_1MM 46.585,121.526 r90 top value=- (schematic designator TP501)
TP501_TSMS_Line "Test Point" TP_SMD_1MM 126.585,121.526 r90 top value=- (schematic designator TP501)

## Footprints (in the part's own frame and the unit in brackets; to place one, negate y for a bottom-side part, rotate by r counter-clockwise, add the part's x,y. Pads: shape width x height; smd on the part's side, far side on the other; paste and mask are expansions set on the pad)
657004140101 [mm]
  rrect50% 2.7x2.7 hole 1.8: 1(8.55,8.47)
  round 2.7 hole 1.8: 2(2.85,8.47) 3(-2.85,8.47) 4(-8.55,8.47)
  round 3.1 hole 3.1 unplated: 5(-8.55,1.17) 6(8.55,1.17)
  silkscreen extent -11.85,-7.5 11.85,7.5, body extent -11.73,-7.4 11.72,9.04, height 8.85
657004150201 [mm]
  body extent -11,-12.73 14,12.73, height 7.1
657004240101 [mm]
  round 2.7 hole 1.8: 1(2.85,0) 2(-2.85,0) 3(2.85,5.5) 4(-2.85,5.5)
  round 3.05 hole 3.05 unplated: ""(0,-7.3)
  silkscreen extent -6.12,-15.97 6.12,0.2, body extent -6.02,-15.91 6.02,6.03, height 14.79
657010240101 [mm]
  round 2.7 hole 1.8 mask+0.102: 1(0,0) 2(-5.7,0) 3(-11.4,0) 4(-17.1,0) 5(-22.8,0) 6(0,5.5) 7(-5.7,5.5) 8(-11.4,5.5) 9(-17.1,5.5) 10(-22.8,5.5)
  round 3.05 hole 3.05 unplated mask+0: ""(-22.8,-7.3) ""(0,-7.3)
  silkscreen extent -26.07,-15.97 3.27,0.2, body extent -25.98,-15.91 3.18,6.03, height 14.79
"CAP SMD 0603" [mm]
  rrect10% 0.75x0.94 smd: 1(-0.7,0) 2(0.7,0)
  body extent -0.8,-0.4 0.8,0.4, height 0.9
"CAP SMD 0805" [mm]
  rrect10% 0.8x1.3 smd: 1(-1,0) 2(1,0)
  silkscreen extent -1.65,-0.89 1.65,0.89, body extent -1,-0.62 1,0.63, height 0.6
"CAP SMD 1210" [mm]
  rrect10% 1.52x2.8 smd: 1(-1.71,0) 2(1.71,0)
  silkscreen extent -2.79,-1.65 2.8,1.65, body extent -1.6,-1.35 1.6,1.35, height 2.5
CAP_10Dx20L [mm]
  round 1.275 hole 0.85: N(5,0)
  rect 1.275x1.275 hole 0.85: P(0,0)
  silkscreen extent -2.5,-5 7.5,5, body extent -2.49,-5 7.49,5, height 19.89
"FUSE SMD 0603" [mm]
  rect 0.95x1.02 smd: 1(-0.785,0) 2(0.785,0)
  body extent -0.8,-0.4 0.8,0.4, height 1
"FUSE SMD 1206" [mm]
  rect 1.1x1.67 smd: 1(-1.46,0) 2(1.46,0)
  silkscreen extent 0,-0.66 0,0.66, body extent -1.59,-0.76 1.59,0.76, height 0.66
HEADERS_MALE_6P_2.54MM [mm]
  rect 1.53x1.53 / inner round 1.53 / far side rect 1.53x1.53 hole 1.02 mask+0.102: 1(-6.35,0)
  round 1.53 hole 1.02 mask+0.102: 2(-3.81,0) 3(-1.27,0) 4(1.27,0) 5(3.81,0) 6(6.35,0)
  silkscreen extent -8.23,-1.25 7.62,1.25, body extent -7.62,-1.27 7.62,1.23, height 8.3
IND_CMM_THT_10x18.5mm [mm]
  rrect50% 1.95x1.95 hole 1.3: 1(-5,-6)
  round 1.95 hole 1.3: 2(5,-6) 3(5,6) 4(-5,6)
  silkscreen extent -13.75,-9.25 13.75,9.25, body extent -12.4,-8.5 12.4,8.53, height 28.88
"LED SMD 0603" [mm]
  rrect10% 0.9x0.95 smd: A(0.8,0) C(-0.8,0)
  silkscreen extent -1.96,-0.75 1.5,0.75, body extent -0.8,-0.38 0.8,0.42, height 0.56
M3 [mm]
  round 3.6 hole 3.5 unplated: 1(0,0)
Octapak-7 [mil]
  rect 22x67 smd: 1(-100.39,-224.5) 2(-66.93,-224.5) 3(-33.46,-224.5) 4(0,-224.5) 5(33.46,-224.5) 6(66.93,-224.5) 7(100.39,-224.5)
  rect 215x231 smd: Tab(0,59.5)
  silkscreen extent -135,-177 135,127, body extent -128,-231 128,151, height 94
"RES SMD 0603" [mm]
  rrect10% 0.9x0.95 smd: 1(-0.8,0) 2(0.8,0)
  silkscreen extent 0,-0.3 0,0.3, body extent -0.8,-0.38 0.8,0.42, height 0.55
"RES SMD 1225 Reversed" [mm]
  rect 1.85x6.5 smd: 1(-1.1,0) 2(1.1,0)
  silkscreen extent -2.37,-3.6 2.38,3.6, body extent -1.55,-3.15 1.55,3.15, height 0.7
"TEN 2" [mm]
  rect 1.448x1.448 hole 0.94: 1(-2.54,0)
  round 1.448 hole 0.94: 2(0,0) 3(2.54,0)
  silkscreen extent -7,-4.69 7,3.61, body extent -7,-3.89 7,3.61, height 10.1
TO-277A-3 [mm]
  rect 1.4x1.27 smd: 1(1.04,-2.765) 2(-1.04,-2.765)
  rect 4.8x4.72 smd: 3(0,1.04)
  silkscreen extent -2.15,-3.97 2.15,-1.8, body extent -2.15,-3 2.15,3.32, height 1.4
TP_SMD_1MM [mm]
  round 1 smd paste-10 mask+0.05: 1(0,0)
  silkscreen extent -0.75,-0.75 0.75,0.75
VSOP-10 [mm]
  rrect25% 1.45x0.3 smd mask+0.05: 1(-2.2,1) 2(-2.2,0.5) 3(-2.2,0) 4(-2.2,-0.5) 5(-2.2,-1) 6(2.2,-1) 7(2.2,-0.5) 8(2.2,0) 9(2.2,0.5) 10(2.2,1)
  silkscreen extent -2.89,-1.5 1.5,1.62, body extent -2.45,-1.5 2.45,1.5, height 1.1

## Part data
C1 C2: library part 001-0104, "Condensadores de cerámica multicapa (MLCC- SMD/SMT) WCAP-CSGP 10uF 50Vol 0.1", Manufacturer="Wurth Elektronik", MPN=885012209073, Package=1210, ComponentLink1Description=Datasheet, ComponentLink1URL=https://www.we-online.com/components/products/datasheet/885012209073.pdf, ComponentLink2Description="Distributor Link", ComponentLink2URL=https://www.mouser.es/ProductDetail/Wurth-Elektronik/885012209073?qs=sPbYRqrBIVm8PsM2ljQIMg%3D%3D, Distributor=Mouser, Distributor PN=710-885012209073, ID=001-0104
C3 C4: library part 001-0102, "Condensadores de cerámica multicapa (MLCC- SMD/SMT) WCAP-CSGP 1uF 50 Vol 10%", Manufacturer="Wurth Elektronik", MPN=885012206126, Package=0603, ComponentLink1Description=Datasheet, ComponentLink1URL=https://www.we-online.com/components/products/datasheet/885012206126.pdf, ComponentLink2Description="Distributor Link", ComponentLink2URL=https://www.mouser.es/ProductDetail/Wurth-Elektronik/885012206126?qs=amGC7iS6iy%2F%252BJOLb%2FSuwig%3D%3D, Distributor=Mouser, Distributor PN=710-885012206126, ID=001-0102
C5 C6: library part 001-0100, "Condensadores de cerámica multicapa (MLCC- SMD/SMT) WCAP-CSGP 0.1uF 0805 10% 50V MLCC", Manufacturer="Wurth Elektronik", MPN=885012207098, Package=0805, ComponentLink1Description=Datasheet, ComponentLink1URL=https://www.we-online.com/components/products/datasheet/885012207098.pdf, ComponentLink2Description="Distributor Link", ComponentLink2URL=https://www.mouser.es/ProductDetail/Wurth-Elektronik/885012207098?qs=0KOYDY2FL29sZCNyRsrK9g%3D%3D, Distributor=Mouser, Distributor PN=710-885012207098, ID=001-0100
C7: library part 003-0001, "Aluminium Electrolytic Capacitors - Radial Leaded WCAP-ATG5 470uF 50V 20% Radial", Manufacturer="Wurth Elektonik", MPN=860020675022, Package=THT;D10xL20mm, ComponentLink1Description=Datasheet, ComponentLink2Description="Distributor Link", Datasheet=https://www.we-online.com/components/products/datasheet/860020675022.pdf, Distributor=Mouser, Distributor Link=https://www.mouser.es/ProductDetail/Wurth-Elektronik/860020675022?qs=0KOYDY2FL28clmrWTWQzzg%3D%3D, Distributor PN=710-860020675022, ID=003-0001
C200 C201 C300 C301 C400_AiM_Line C400_RLS_Line C401_AiM_Line C401_RLS_Line C500_BMS_Line C500_IMD_Line C500_INV_Line C500_Ref_Line C500_TSMS_Line C501_BMS_Line C501_IMD_Line C501_INV_Line C501_Ref_Line C501_TSMS_Line: library part 001-0112, "Condensadores de cerámica multicapa (MLCC- SMD/SMT) WCAP-CSGP 0.1uF 0603 10% 16V MLCC", Manufacturer="Wurth Elektronik", MPN=885012206046, Package=0603, ComponentLink1Description=Datasheet, ComponentLink1URL=https://www.we-online.com/components/products/datasheet/885012206046.pdf, ComponentLink2Description="Distributor Link", ComponentLink2URL=https://www.mouser.es/ProductDetail/Wurth-Elektronik/885012206046?qs=0KOYDY2FL2%252B89gr6HvTBXA%3D%3D, Distributor=Mouser, Distributor PN=710-885012206046, ID=001-0112
C202 C302 C402_AiM_Line C402_RLS_Line C502_BMS_Line C502_IMD_Line C502_INV_Line C502_Ref_Line C502_TSMS_Line: library part 001-0110, "Condensadores de cerámica multicapa (MLCC- SMD/SMT) WCAP-CSGP 1uF 0603 10% 16V MLCC", Manufacturer="Wurth Elektronik", MPN=885012206052, Package=0603, ComponentLink1Description=Datasheet, ComponentLink1URL=https://www.we-online.com/components/products/datasheet/885012206052.pdf, ComponentLink2Description="Distributor Link", ComponentLink2URL=https://www.mouser.es/ProductDetail/Wurth-Elektronik/885012206052?qs=0KOYDY2FL2%2F2JKabApojcQ%3D%3D, Distributor=Mouser, Distributor PN=710-885012206052, ID=001-0110
D1: library part 031-0012, "Diodos y rectificadores Schottky 20A,100VG2PSKYSMPCRect.", Manufacturer="Vishay Semiconductors", MPN=SS20PH102HM3/I, Package=TO-277A-2, ComponentLink1Description=Datasheet, ComponentLink1URL=https://www.mouser.es/ProductDetail/Vishay-Semiconductors/SS20PH102HM3-I?qs=G4MbTVxgV4H1JubFDv9ZpA%3D%3D, ComponentLink2Description="Distributor Link", ComponentLink2URL=https://www.vishay.com/docs/98847/ss20ph102.pdf, Distributor=Mouser, Distributor PN=78-SS20PH102HM3/I, ID=031-0012
F1: library part 040-0026, "Surface Mount Fuses 12A 32V FAST ACTING", Manufacturer=Littelfuse, MPN=0501012.WRA, Package=1206, ComponentLink1Description=Datasheet, ComponentLink1URL=https://www.littelfuse.com/assetdocs/littelfuse_fuse_501a_datasheet.pdf?assetguid=16e534f2-c7ad-421d-9fb1-2d7646704d65, ComponentLink2Description="Distributor Link", ComponentLink2URL=https://www.mouser.es/en/ProductDetail/Littelfuse/0501012.WRA?qs=r5DSvlrkXmL6WmckR9m8eg%3D%3D, Distributor=Mouser, Distributor PN=576-0501012.WRA, ID=040-0026
F100: library part 040-0025, "Surface Mount Fuses 3.15A Slow Blow 0603 SinglFuse", Manufacturer=Bourns, MPN=SF-0603S315-2, Package=0603, ComponentLink1Description=Datasheet, ComponentLink1URL=https://www.mouser.es/datasheet/3/40/1/sf0603s.pdf, ComponentLink2Description="Distributor Link", ComponentLink2URL=https://www.mouser.es/en/ProductDetail/Bourns/SF-0603S315-2?qs=GIQXYiEeHGBW8r%252BkbDjk9Q%3D%3D, Distributor=Mouser, Distributor PN=652-SF-0603S315-2, ID=040-0025
H100 H101 H102 H103: library part 100-0002, "M3 Screw", Manufacturer=-, ComponentLink1Description=Datasheet, ComponentLink1URL=-, ComponentLink2Description="Distributor Link", ComponentLink2URL=-, Distributor=-, Distributor PN=-, ID=100-0002, MPN=-, Package=-
IC100 IC200: library part 070-0001, "Convertidores DC/DC para montaje pasante 4.75-36Vin 3.3V 2A switching regulator", Manufacturer="TRACO Power", MPN="TSR 2-2433", Package=14.0x7.5x10.1mm, ComponentLink1Description=Datasheet, ComponentLink1URL=https://www.tracopower.com/tsr2-datasheet, ComponentLink2Description="Distributor Link", ComponentLink2URL=https://www.mouser.es/ProductDetail/TRACO-Power/TSR-2-2433?qs=NtE2QagKf6Qer8edccxn%2FA%3D%3D, Distributor=Mouser, Distributor PN=495-TSR2-2433, ID=070-0001
IC201 IC302 IC402_AiM_Line IC402_RLS_Line IC501_BMS_Line IC501_IMD_Line IC501_INV_Line IC501_Ref_Line IC501_TSMS_Line: library part 050-0001, "Monitores y reguladores de corriente y energía Hi-Side Msmt Bi-Dir Current/Pwr Mon A 59 A 595-INA226AIDGST", Manufacturer=595-INA226AIDGSR, MPN=INA226AIDGSR, Package=MSOP-10, ComponentLink1Description=Datasheet, ComponentLink1URL=https://www.ti.com/lit/ds/symlink/ina226.pdf?ts=1772078114731&ref_url=https%253A%252F%252Fwww.ti.com%252Fproduct%252FINA226, ComponentLink2Description="Distributor Link", ComponentLink2URL=https://www.mouser.es/ProductDetail/Texas-Instruments/INA226AIDGSR?qs=tQG3bEuiOZD4quG3egR36g%3D%3D&srsltid=AfmBOopOjh8KVXQVeHwZlO8DxeOetC6-xgaoNkKslHEV4iGJ_SkIIo7K, Distributor=Mouser, Distributor PN="Texas Instruments", ID=050-0001
IC300: library part 070-0002, "Convertidores DC/DC para montaje pasante 6.5-36Vin 5V 2A SIP switching regulator", Manufacturer="TRACO Power", MPN="TSR 2-2450", Package=14.0x7.5x10.1mm, ComponentLink1Description=Datasheet, ComponentLink1URL=https://www.tracopower.com/tsr2-datasheet, ComponentLink2Description="Distributor Link", ComponentLink2URL=https://www.mouser.es/ProductDetail/TRACO-Power/TSR-2-2450?qs=NtE2QagKf6RzknAolzm%2FTQ%3D%3D, Distributor=Mouser, Distributor PN=495-TSR2-2450, ID=070-0002
IC301 IC401_AiM_Line IC401_RLS_Line IC500_BMS_Line IC500_IMD_Line IC500_INV_Line IC500_Ref_Line IC500_TSMS_Line: library part 050-0002, "Controlador de puerta High side driver with current sense analog feedback for automotive applications", Manufacturer=511-VN7007AHTR, Package=Octapak-7, ComponentLink1Description=Datasheet, ComponentLink1URL=https://www.st.com/resource/en/datasheet/vn7007ah.pdf, ComponentLink2Description="Distributor Link", ComponentLink2URL=https://www.mouser.es/ProductDetail/STMicroelectronics/VN7007AHTR?qs=mKNKSX85ZJecQmIqUrqpTA%3D%3D, Distributor=Mouser, Distributor PN=STMicroelectronics, ID=050-0002, MPN=VN7007AHTR
IC400_AiM_Line IC400_RLS_Line: library part 070-0003, "Convertidores DC/DC para montaje pasante 15-36Vin 12V 2A SIP switching regulator", Manufacturer="TRACO Power", MPN="TSR 2-24120", Package=14.0x7.5x10.1mm, ComponentLink1Description=Datasheet, ComponentLink1URL=https://www.tracopower.com/tsr2-datasheet, ComponentLink2Description="Distributor Link", ComponentLink2URL=https://www.mouser.es/ProductDetail/TRACO-Power/TSR-2-24120?qs=NtE2QagKf6T34HiGRDOLrw%3D%3D, Distributor=Mouser, Distributor PN=495-TSR2-24120, ID=070-0003
J100: library part 110-0069, "Headers & Wire Housings WR-MPC5 THT Dual Row Male Header Right Angled with Snap-in Plastic Pegs Glow-Wire 10 Pins", Manufacturer="Wurth Elektronik", MPN=657010240101, Package="THT 5,7mm", ComponentLink1Description=Datasheet, ComponentLink1URL=https://www.we-online.com/components/products/datasheet/657010240101.pdf, ComponentLink2Description="Distributor Link", ComponentLink2URL=https://www.mouser.es/en/ProductDetail/Wurth-Elektronik/657010240101?qs=Z%252BL2brAPG1L7pimSXLZIOg%3D%3D, Distributor=Mouser, Distributor PN=710-657010240101, ID=110-0069
J101: library part 110-0070, "Headers & Wire Housings WR-MPC5 THT Dual Row Male Header Right Angled with Snap-in Plastic Pegs Glow-Wire 4 Pins", Manufacturer="Wurth Elektronik", MPN=657004240101, Package="THT 5,7mm", ComponentLink1Description=Datasheet, ComponentLink1URL=https://www.we-online.com/components/products/datasheet/657004240101.pdf, ComponentLink2Description="Distributor Link", ComponentLink2URL=https://www.mouser.es/en/ProductDetail/Wurth-Elektronik/657004240101?qs=Z%252BL2brAPG1IceqvpwioElw%3D%3D, Distributor=Mouser, Distributor PN=710-657004240101, ID=110-0070
J108: library part 110-0060, "Receptacle Single Row", Manufacturer="Wurth Elektronik", MPN=657004150201, Package="THT 5,7mm", ComponentLink1Description=Datasheet, ComponentLink1URL=https://www.we-online.com/components/products/datasheet/657004150201.pdf, ComponentLink2Description="Distributor Link", ComponentLink2URL=https://www.we-online.com/en/components/products/WTB_WR_MPC5_RECEPTACLE_PLUG_SINGLE_ROW#/articles/WTB_WR_MPC5_SINGLE_ROW_RECEPTACLE_HOUSING, Distributor="Wurth Elektronik", Distributor PN=657004150201, ID=110-0060
J109: library part 110-0059, "WR-MPC5 Male Header Single Row", Manufacturer="Wurth Elektronik", MPN=657004140101, Package="THT 5,7mm", ComponentLink1Description=Datasheet, ComponentLink1URL=https://www.we-online.com/components/products/datasheet/657004140101.pdf, ComponentLink2Description="Distributor Link", ComponentLink2URL=https://www.we-online.com/en/components/products/WTB_WR_MPC5_SINGLE_ROW, Distributor="Wurth Elektronik", Distributor PN=657004140101, ID=110-0059
J116 J117: library part 110-0050, "Pin Header 6 Position 2.54mm Pitch Single Row Through Hole -55℃~+105℃", Manufacturer=HanElectricity, MPN=2541WV-06P, Package="THT 2,54mm", ComponentLink1Description=Datasheet, ComponentLink1URL=https://www.lcsc.com/datasheet/C5383115.pdf, ComponentLink2Description="Distributor Link", ComponentLink2URL=https://www.lcsc.com/product-detail/C5383115.html, Distributor=LCSC, Distributor PN=C5383115, ID=110-0050
L1: library part 023-0001, "Common Mode Chokes / Filters WE-CMB Type XXL .5mH 35A 2.3mOhm", Manufacturer="Wurth Elektronik", MPN=7448263505, Package=47x43x23.5mm, ComponentLink1Description=Datasheet, ComponentLink2Description="Distributor Link", Datasheet=https://www.we-online.com/components/products/datasheet/7448263505.pdf, Distributor=Mouser, Distributor Link=https://www.mouser.es/ProductDetail/Wurth-Elektronik/7448263505?qs=2kOmHSv6VfR2wo62vNWXfg%3D%3D, Distributor PN=710-7448263505, ID=023-0001
L100 L200 L300 L400_AiM_Line L400_RLS_Line L500_BMS_Line L500_IMD_Line L500_INV_Line L500_Ref_Line L500_TSMS_Line: library part 033-0023, "LED de un solo color Green 525nm 1400mcd 2.85V 73deg 0603", Manufacturer="Vishay Semiconductors", MPN=VLMTG1400-GS08, Package=0603, ComponentLink1Description=Datasheet, ComponentLink1URL=https://www.vishay.com/docs/84393/vlmtg1400.pdf, ComponentLink2Description="Distributor Link", ComponentLink2URL=https://www.mouser.es/ProductDetail/Vishay-Semiconductors/VLMTG1400-GS08?qs=gt1LBUVyoHlZ6yHd8iEIzQ%3D%3D, Distributor=Mouser, Distributor PN=78-VLMTG1400-GS08, ID=033-0023
R100 R405_AiM_Line R405_RLS_Line R503_BMS_Line R503_IMD_Line R503_INV_Line R503_Ref_Line R503_TSMS_Line: library part 010-0146, "Resistores de película gruesa - SMD WRIS-RSKS 1.8 kOhms 1 % 0.1 W 0603 AEC-Q200", Manufacturer="Wurth Elektronik", MPN=560112116032, Package=0603, ComponentLink1Description=Datasheet, ComponentLink1URL=https://www.we-online.com/components/products/datasheet/560112116032.pdf, ComponentLink2Description="Distributor Link", ComponentLink2URL=https://www.mouser.es/ProductDetail/Wurth-Elektronik/560112116032?qs=mELouGlnn3dPZZEXKb4zAQ%3D%3D, Distributor=Mouser, Distributor PN=710-560112116032, ID=010-0146
R101 R102 R204 R300 R301 R306 R400_AiM_Line R400_RLS_Line R402_AiM_Line R402_RLS_Line R406_AiM_Line R406_RLS_Line R500_BMS_Line R500_IMD_Line R500_INV_Line R500_Ref_Line R500_TSMS_Line R501_BMS_Line R501_IMD_Line R501_INV_Line R501_Ref_Line R501_TSMS_Line R506_BMS_Line R506_IMD_Line R506_INV_Line R506_Ref_Line R506_TSMS_Line: library part 010-0145, "Resistores de película gruesa - SMD WRIS-RSKS 10 kOhms 1 % 0.1 W 0603 AEC-Q200", Manufacturer="Wurth Elektronik", MPN=560112116005, Package=0603, ComponentLink1Description=Datasheet, ComponentLink1URL=https://www.we-online.com/components/products/datasheet/560112116005.pdf, ComponentLink2Description="Distributor Link", ComponentLink2URL=https://www.mouser.es/ProductDetail/Wurth-Elektronik/560112116005?qs=mELouGlnn3dMVSPHwBGouA%3D%3D, Distributor=Mouser, Distributor PN=710-560112116005, ID=010-0145
R103 R104: library part 010-0142, "Resistores de película gruesa - SMD WRIS-RSKS <0.05 Ohms 0.1 W Jumper 0603 AEC-Q200", Manufacturer="Wurth Elektronik", MPN=560112116001, Package=0603, ComponentLink1Description=Datasheet, ComponentLink1URL=https://www.we-online.com/components/products/datasheet/560112116001.pdf, ComponentLink2Description="Distributor Link", ComponentLink2URL=https://www.mouser.es/ProductDetail/Wurth-Elektronik/560112116001?qs=mELouGlnn3dlnHYj7TecuA%3D%3D, Distributor=Mouser, Distributor PN=710-560112116001, ID=010-0142
R200 R302 R401_AiM_Line R401_RLS_Line R502_BMS_Line R502_IMD_Line R502_INV_Line R502_Ref_Line R502_TSMS_Line: library part 015-0003, "Resistores de detección de corriente - SMD 3W 0.007ohm 1% 50ppm", Manufacturer=Susumu, MPN=KRL6432E-M-R007-F-T1, Package="1225 (Reversed)", ComponentLink1Description=Datasheet, ComponentLink1URL=https://www.mouser.es/datasheet/3/826/1/n_catalog_partition19_en.pdf, ComponentLink2Description="Distributor Link", ComponentLink2URL=https://www.mouser.es/ProductDetail/Susumu/KRL6432E-M-R007-F-T1?qs=FG09h9tFCuA5fgBuyupdEw%3D%3D, Distributor=Mouser, Distributor PN=754-KRL6432EMR007FT1, ID=015-0003
R201: library part 010-0172, "Thick Film Resistors WRIS-RSKS 100 Ohms 1 % 0.1 W 0603 AEC-Q200", Manufacturer="Wurth Elektronik", MPN=560112116009, Package=0603, ComponentLink1Description=Datasheet, ComponentLink1URL=https://www.we-online.com/components/products/datasheet/560112116009.pdf, ComponentLink2Description="Distributor Link", ComponentLink2URL=https://www.mouser.es/ProductDetail/Wurth-Elektronik/560112116009?qs=sGAEpiMZZMvdGkrng054txLI%2FDB4oIKDTCqaE%2Fpesdwv2JWXHdCmlQ%3D%3D, Distributor=Mouser, Distributor PN=710-560112116009, ID=010-0172
R202 R203 R304 R305 R403_AiM_Line R403_RLS_Line R404_AiM_Line R404_RLS_Line R504_BMS_Line R504_IMD_Line R504_INV_Line R504_Ref_Line R504_TSMS_Line R505_BMS_Line R505_IMD_Line R505_INV_Line R505_Ref_Line R505_TSMS_Line: library part 010-0149, "Resistores de película gruesa - SMD WRIS-RSKS 10 Ohms 1 % 0.1 W 0603 AEC-Q200", Manufacturer="Wurth Elektronik", MPN=560112116013, Package=0603, ComponentLink1Description=Datasheet, ComponentLink1URL=https://www.we-online.com/components/products/datasheet/560112116013.pdf, ComponentLink2Description="Distributor Link", ComponentLink2URL=https://www.mouser.es/ProductDetail/Wurth-Elektronik/560112116013?qs=mELouGlnn3f7quibYlpocQ%3D%3D, Distributor=Mouser, Distributor PN=710-560112116013, ID=010-0149
R303: library part 010-0191, "Resistores de película gruesa - SMD WRIS-RSKS 220 Ohms 1 % 0.1 W 0603 AEC-Q200", Manufacturer="Wurth Elektronik", MPN=560112116126, Package=0603, ComponentLink1Description=Datasheet, ComponentLink1URL=https://www.we-online.com/components/products/datasheet/560112116126.pdf, ComponentLink2Description="Distributor Link", Distributor=Mouser, Distributor PN=710-560112116126, ID=010-0191
TP1 TP2 TP100 TP101 TP102 TP105 TP107 TP108 TP109 TP110 TP111 TP112 TP113 TP114 TP115 TP116 TP200 TP300 TP301 TP400_AiM_Line TP400_RLS_Line TP401_AiM_Line TP401_RLS_Line TP501_BMS_Line TP501_IMD_Line TP501_INV_Line TP501_Ref_Line TP501_TSMS_Line: library part 110-0007, Manufacturer=-, ComponentLink1Description=Datasheet, ComponentLink1URL=-, ComponentLink2Description="Distributor Link", ComponentLink2URL=-, Distributor=-, Distributor PN=-, ID=110-0007, MPN=-, Package=-

## Via types
v1: diameter 0.7, hole 0.35, Top Layer to Bottom Layer, 47 vias

## Nets (pads, with @x,y where several pads share a name; then routed paths per layer and width w, separated by ;. In a path a pad name is that pad's centre, name@x,y a point inside that pad or via, vN(x,y) a via of type N, cw(c..) or ccw(c..) an arc to the next point about the centre after c; other vN are vias at no path point)
3V3: C201.2 C202.2 C301.2 C302.2 C401_AiM_Line.2 C401_RLS_Line.2 C402_AiM_Line.2 C402_RLS_Line.2 C501_BMS_Line.2 C501_IMD_Line.2 C501_INV_Line.2 C501_Ref_Line.2 C501_TSMS_Line.2 C502_BMS_Line.2 C502_IMD_Line.2 C502_INV_Line.2 C502_Ref_Line.2 C502_TSMS_Line.2 IC100.3 IC201.6 IC302.1 IC302.6 IC402_AiM_Line.1 IC402_AiM_Line.2 IC402_AiM_Line.6 IC402_RLS_Line.1 IC402_RLS_Line.6 IC501_BMS_Line.6 IC501_IMD_Line.6 IC501_INV_Line.1 IC501_INV_Line.6 IC501_Ref_Line.6 IC501_TSMS_Line.2 IC501_TSMS_Line.6 R101.1 R102.1 R204.1 R306.1 R406_AiM_Line.1 R406_RLS_Line.1 R506_BMS_Line.2 R506_IMD_Line.2 R506_INV_Line.2 R506_Ref_Line.2 R506_TSMS_Line.2 TP101.1 | length 66.4
  Top Layer w0.254: R506_Ref_Line.2@44.785,118.176 v1(44.785,119.776) ; IC501_Ref_Line.6@45.585,113.676 C501_Ref_Line.2@45.585,111.071 C502_Ref_Line.2@45.585,109.071 v1(47.185,109.071) ; R506_IMD_Line.2@64.785,118.176 v1(64.785,119.776) ; IC501_IMD_Line.6@65.585,113.676 C501_IMD_Line.2@65.585,111.071 C502_IMD_Line.2@65.585,109.071 v1(67.185,109.071) ; R506_INV_Line.2@84.785,118.176 v1(84.785,119.776) ; IC501_INV_Line.6@85.585,113.676 C501_INV_Line.2@85.585,111.071 C502_INV_Line.2@85.585,109.071 v1(87.185,109.071) ; R506_BMS_Line.2@104.785,118.176 v1(104.785,119.776) ; IC501_BMS_Line.6@105.585,113.676 C501_BMS_Line.2@105.585,111.071 C502_BMS_Line.2@105.585,109.071 v1(107.185,109.071) ; R506_TSMS_Line.2@124.785,118.176 v1(124.785,119.776) ; IC501_TSMS_Line.6@125.585,113.676 C502_TSMS_Line.2@125.585,109.071 v1(127.185,109.071)
  Bottom Layer w0.254: v1(76.685,109.071) C402_RLS_Line.2@78.185,109.071 IC402_RLS_Line.6@78.185,113.676 ; R406_RLS_Line.1@78.985,118.176 v1(78.985,119.676) ; v1(96.685,109.071) C402_AiM_Line.2@98.185,109.071 IC402_AiM_Line.6@98.185,113.676 ; R406_AiM_Line.1@98.985,118.176 v1(98.985,119.676) ; v1(116.685,109.071) C302.2@118.185,109.071 C301.2@118.185,111.071 IC302.6@118.185,113.676 ; R306.1@118.985,118.176 v1(118.985,119.676) ; C202.2@138.185,109.071 IC201.6@138.185,113.676
3V3_OUT: J116.3 R200.1 R201.2 R203.2 TP114.1
5V_OUT: J116.2 R302.1 R303.2 R305.2 TP113.1
12V_OUT_AiM_Line: J101.3 R401_AiM_Line.1 R404_AiM_Line.2 R405_AiM_Line.2 TP111.1
12V_OUT_RLS_Line: J101.4 R401_RLS_Line.1 R404_RLS_Line.2 R405_RLS_Line.2 TP112.1
24V: C1.1 C2.1 C3.1 C4.1 C5.1 C6.1 F100.1 IC200.1 IC300.1 IC400_AiM_Line.1 IC400_RLS_Line.1 IC500_BMS_Line.Tab IC500_IMD_Line.Tab IC500_INV_Line.Tab IC500_Ref_Line.Tab IC500_TSMS_Line.Tab L1.2 R100.2 TP2.1 TP100.1
24V_OUT_BMS_Line: J100.9 R502_BMS_Line.1 R503_BMS_Line.2 R505_BMS_Line.2 TP109.1
24V_OUT_IMD_Line: J100.8 R502_IMD_Line.1 R503_IMD_Line.2 R505_IMD_Line.2 TP108.1
24V_OUT_INV_Line: J100.10 R502_INV_Line.1 R503_INV_Line.2 R505_INV_Line.2 TP110.1
24V_OUT_Ref_Line: J100.6 R502_Ref_Line.1 R503_Ref_Line.2 R505_Ref_Line.2 TP105.1
24V_OUT_TSMS_Line: J100.7 R502_TSMS_Line.1 R503_TSMS_Line.2 R505_TSMS_Line.2 TP107.1